# Altium PCB uw_ipmc_zynq.PcbDoc (part 1 of 3)
Units mil, origin at the board's own origin, x right, y up, seen from the top; angles counter-clockwise.
Board outline 3228.35 x 1181.1 mil, 10 copper layers (Component Side, Ground Plane 1 (GND), Inner Layer 1, Inner Layer 2, Power Plane 1, Power Plane 2, Inner Layer 3, Inner Layer 4, Power Plane 3, Solder Side), stack 39.78 mil thick; 400 components, 397 nets, 1698 pads, 375 vias.
Unrouted connection lines stored in the file: 685.
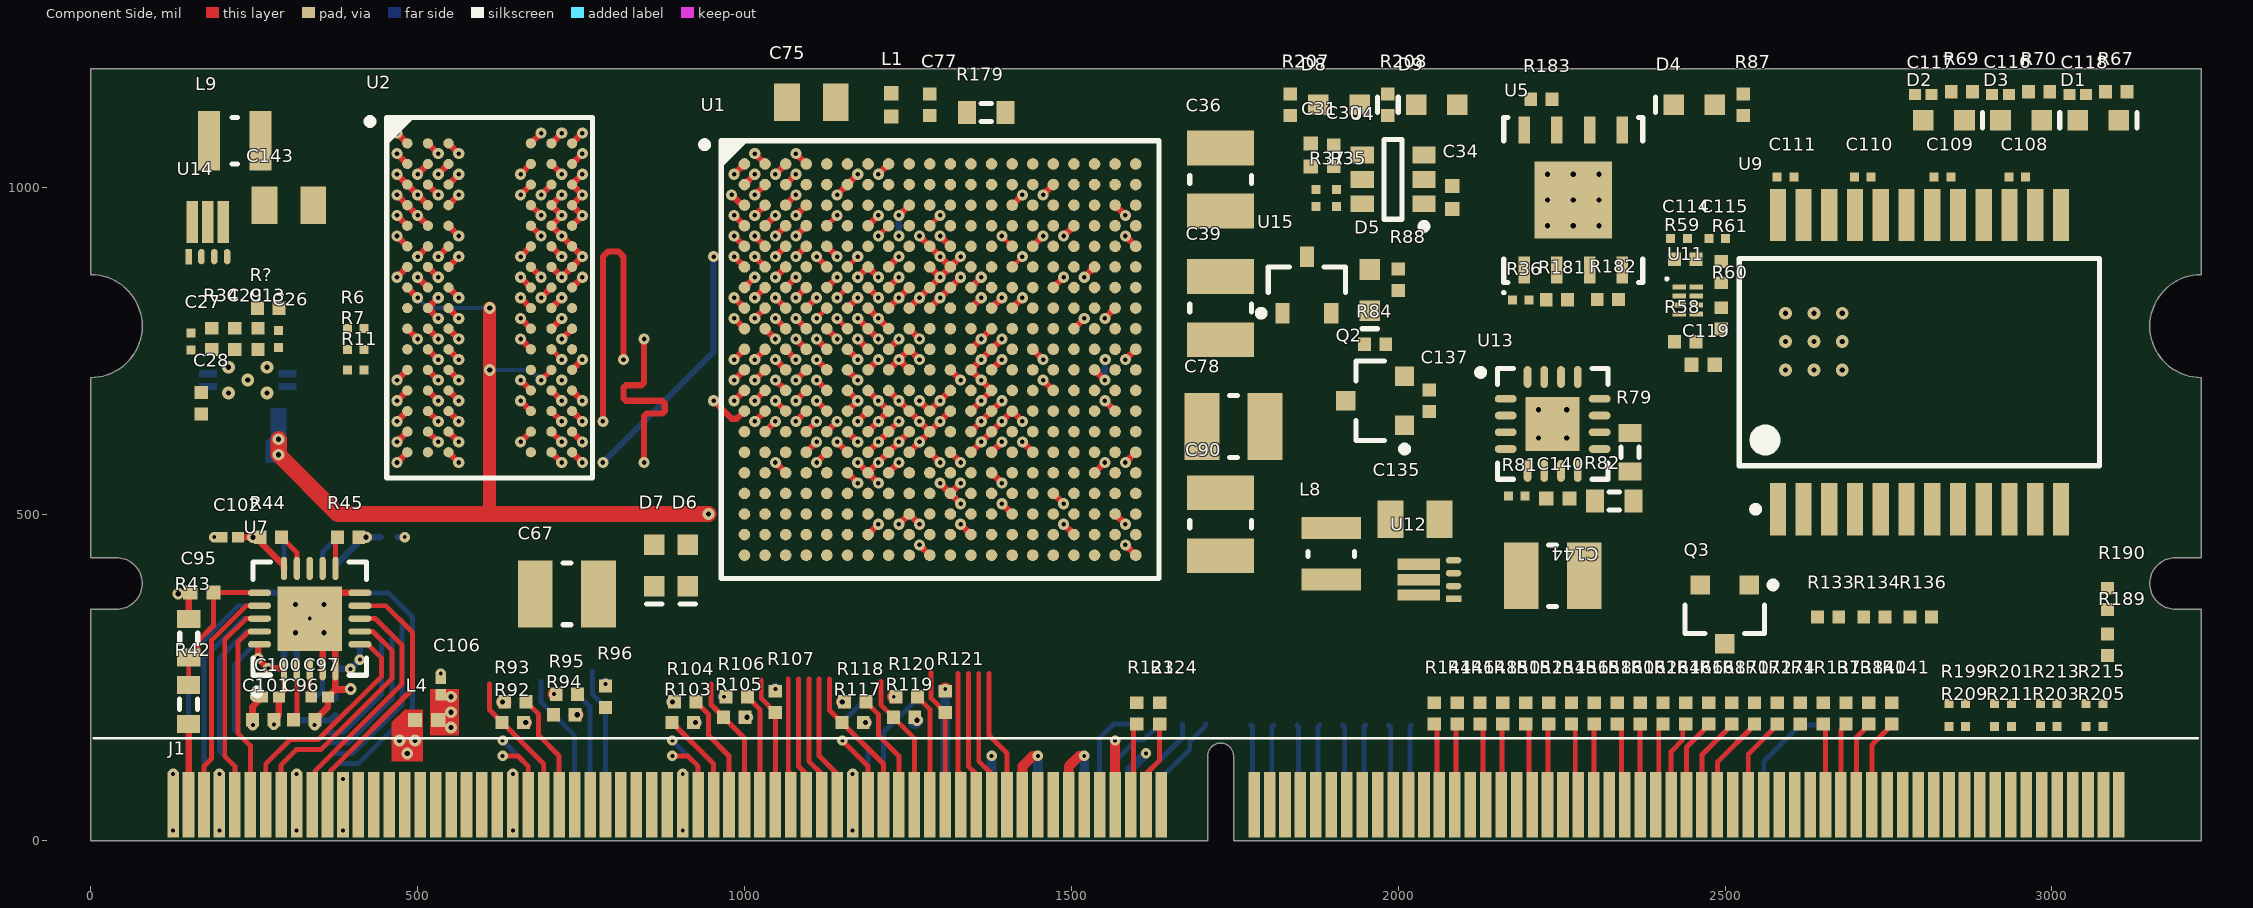
[diagram p0: Component Side view]
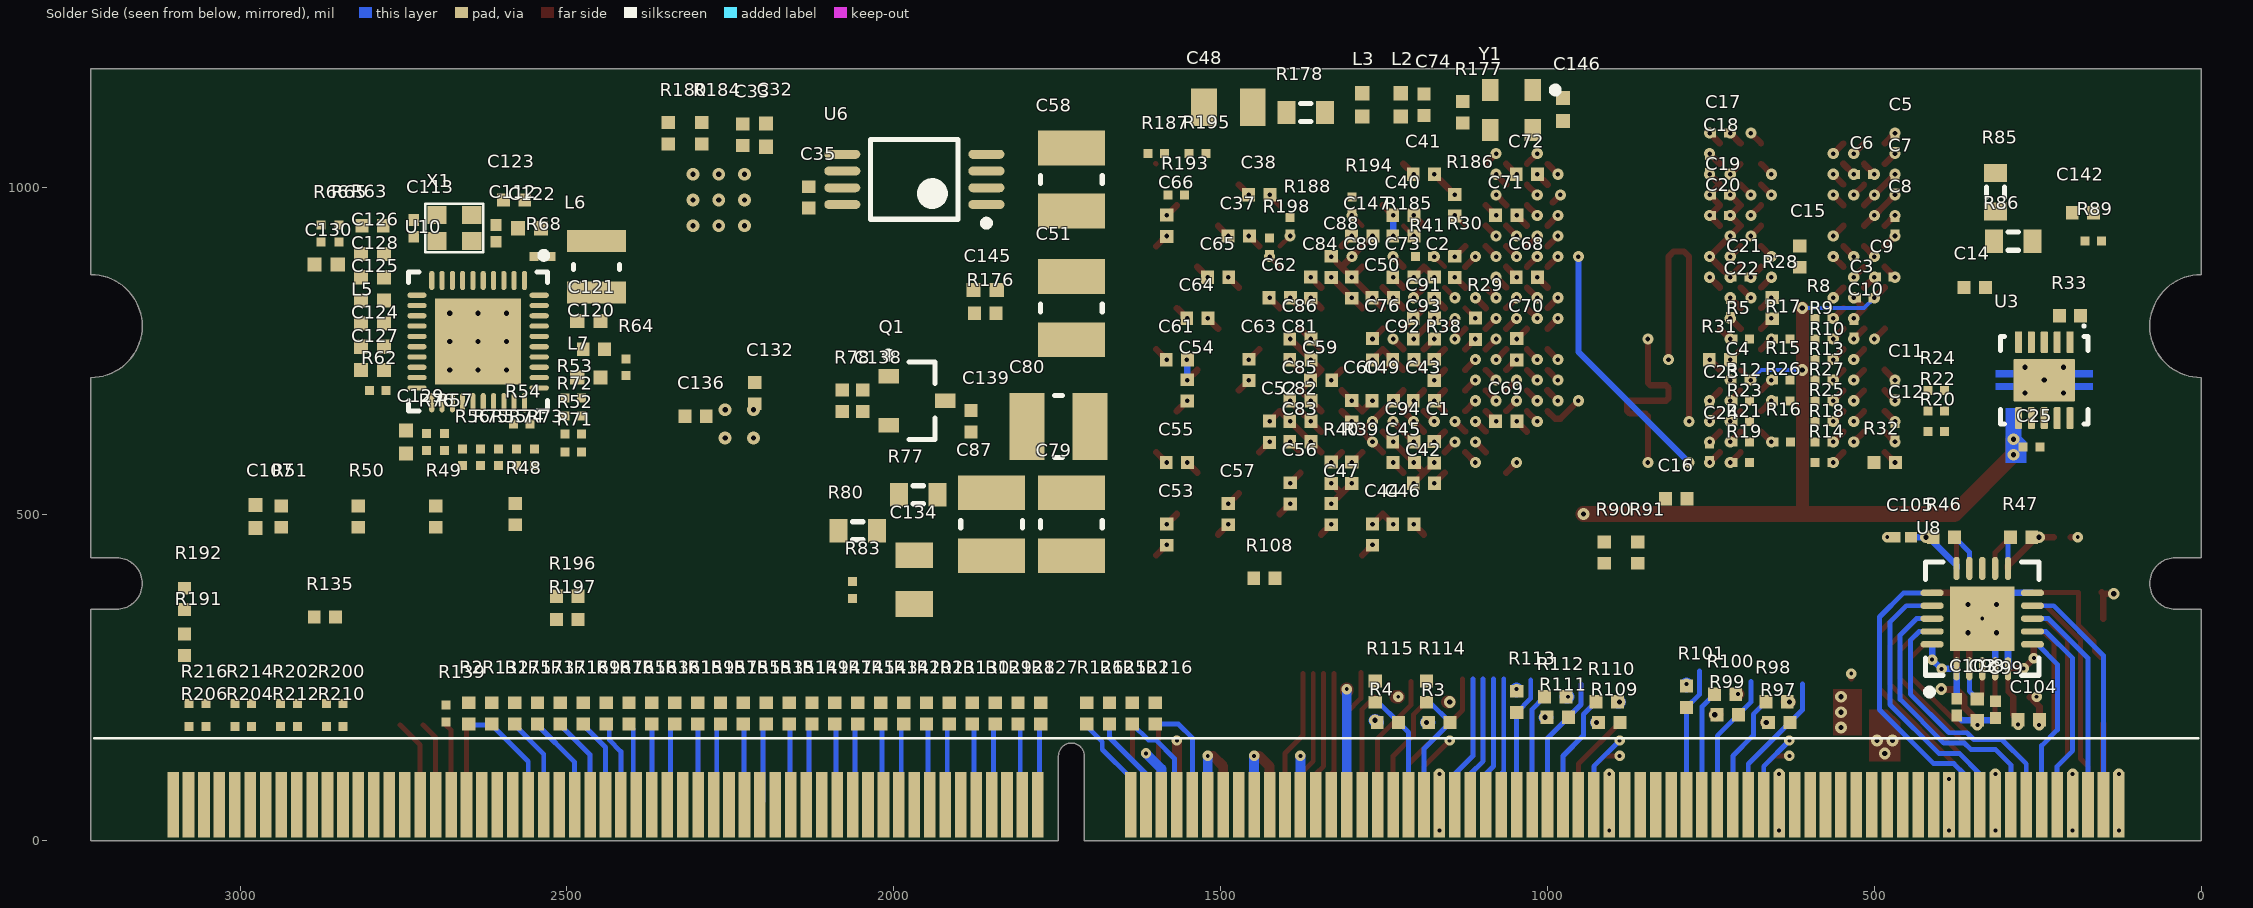
[diagram p1: Solder Side view, seen from below]
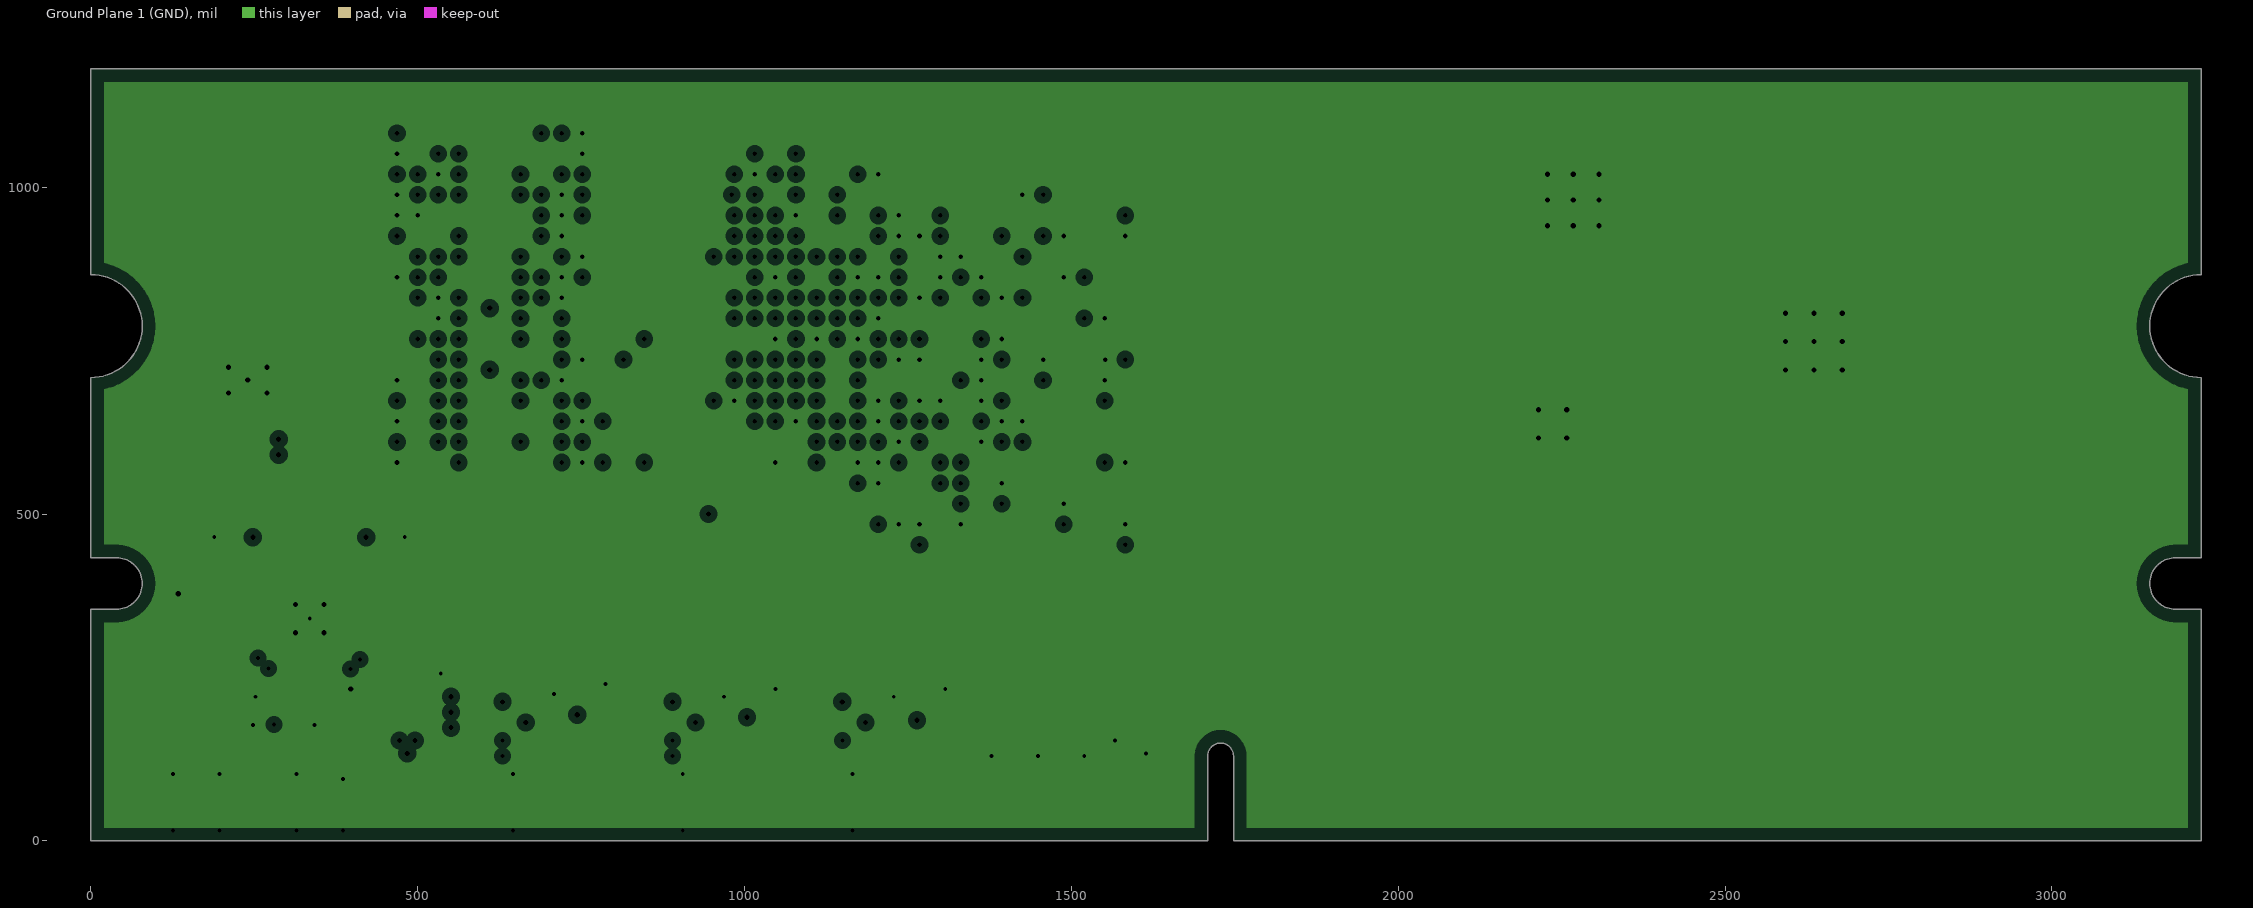
[diagram p2: Ground Plane 1 (GND), clearances drawn from the general rule]
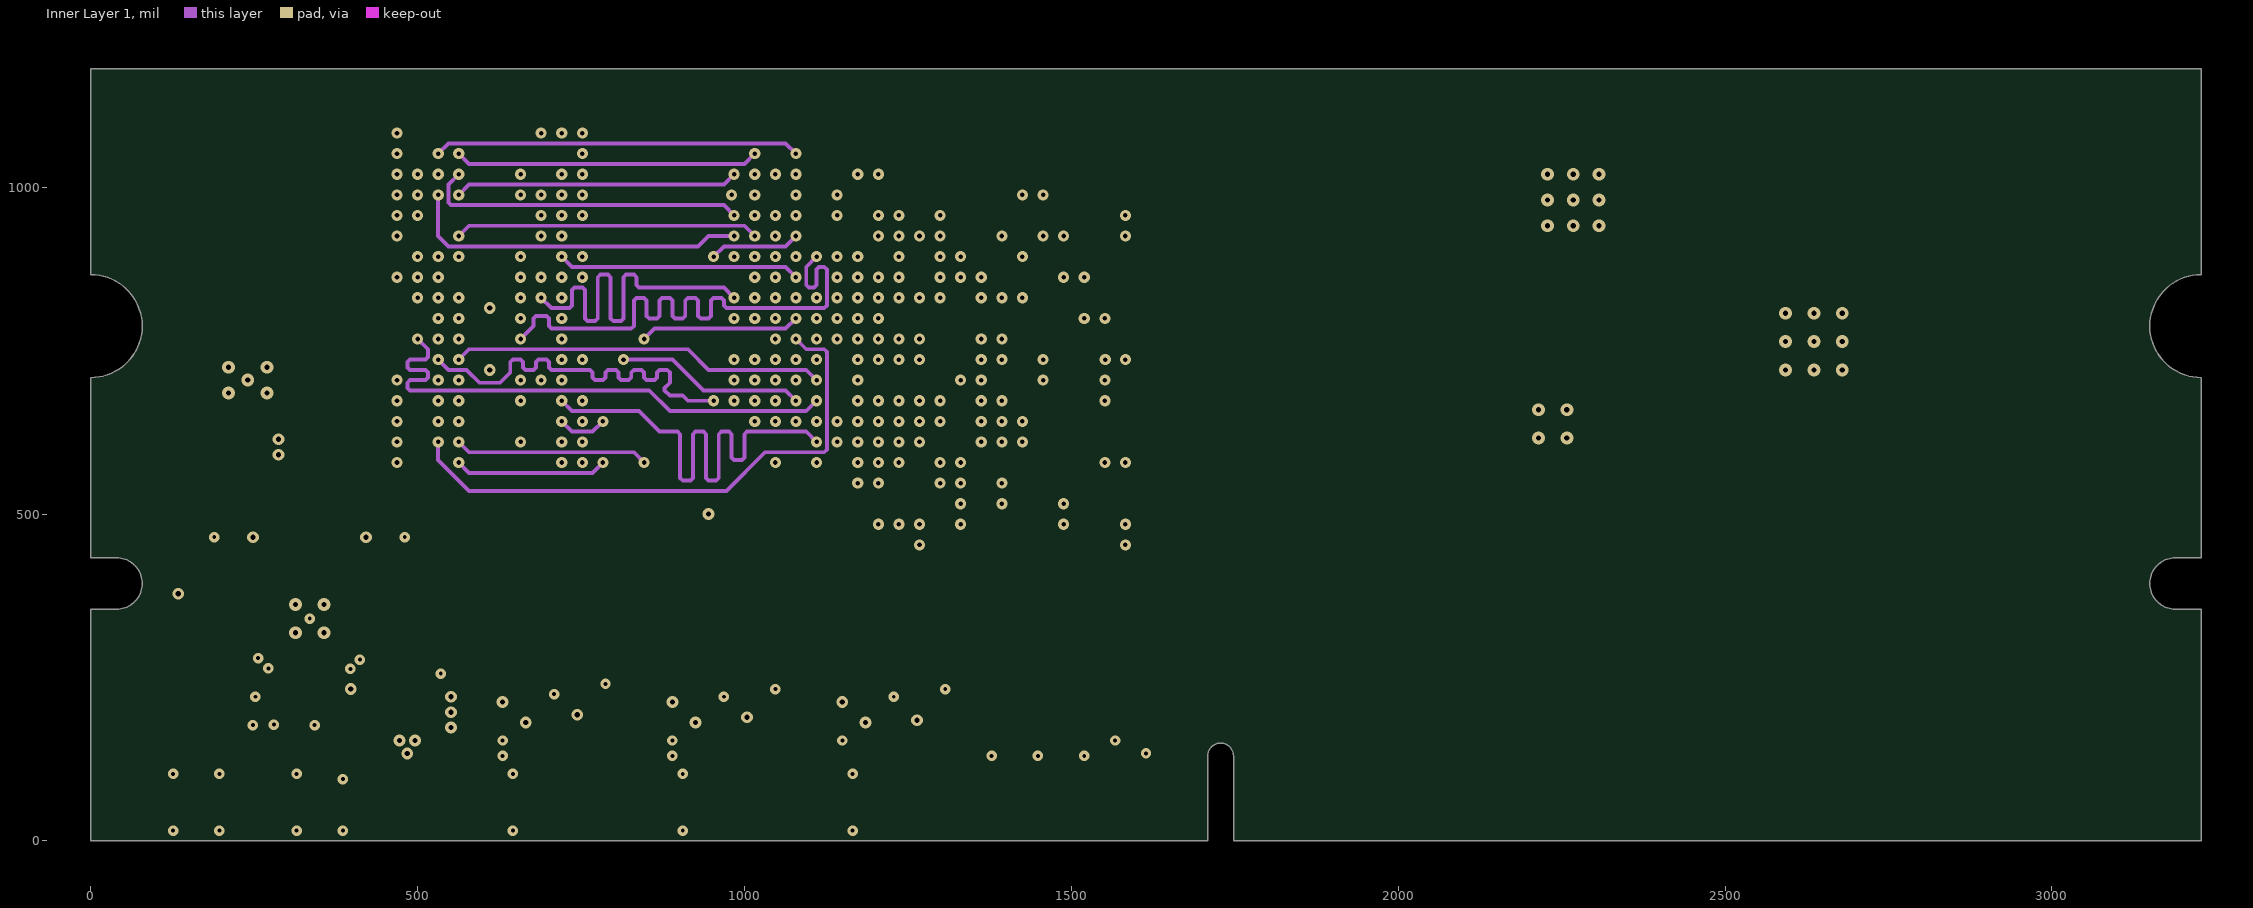
[diagram p3: Inner Layer 1]
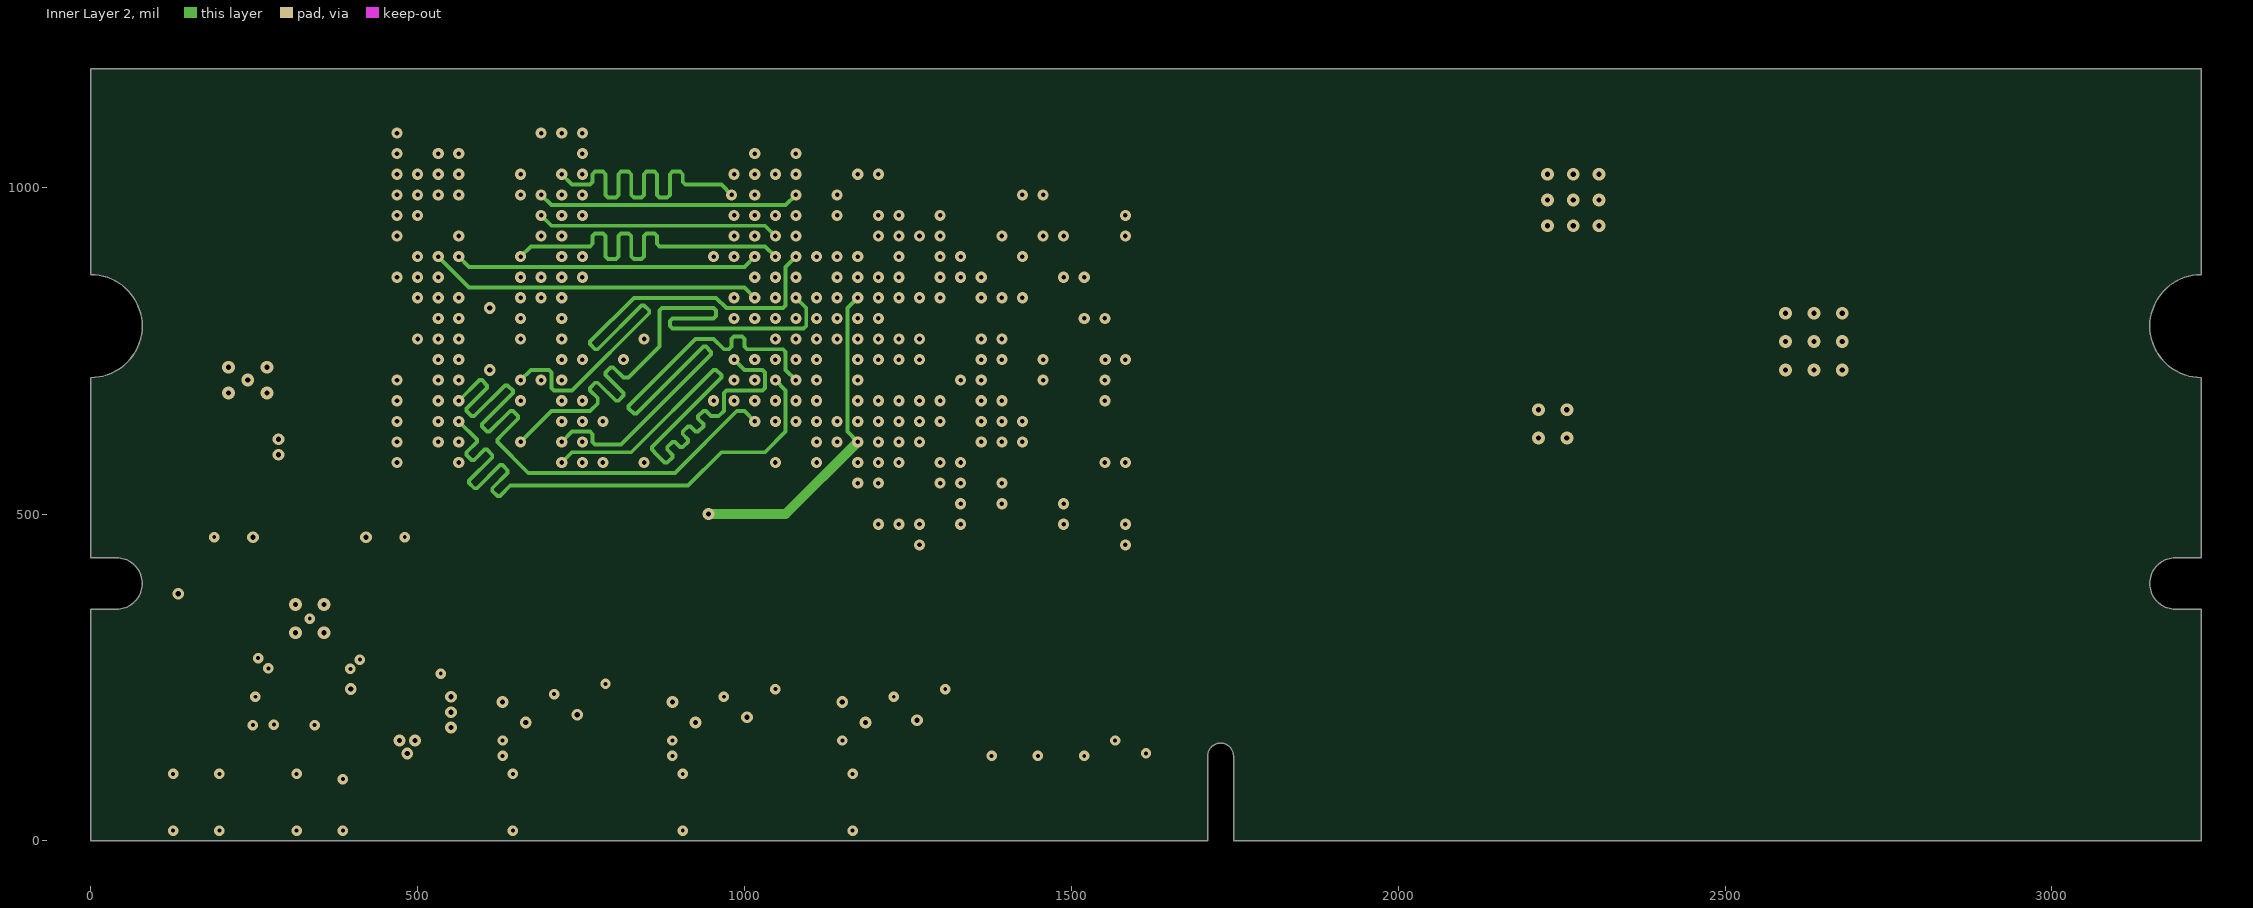
[diagram p4: Inner Layer 2]
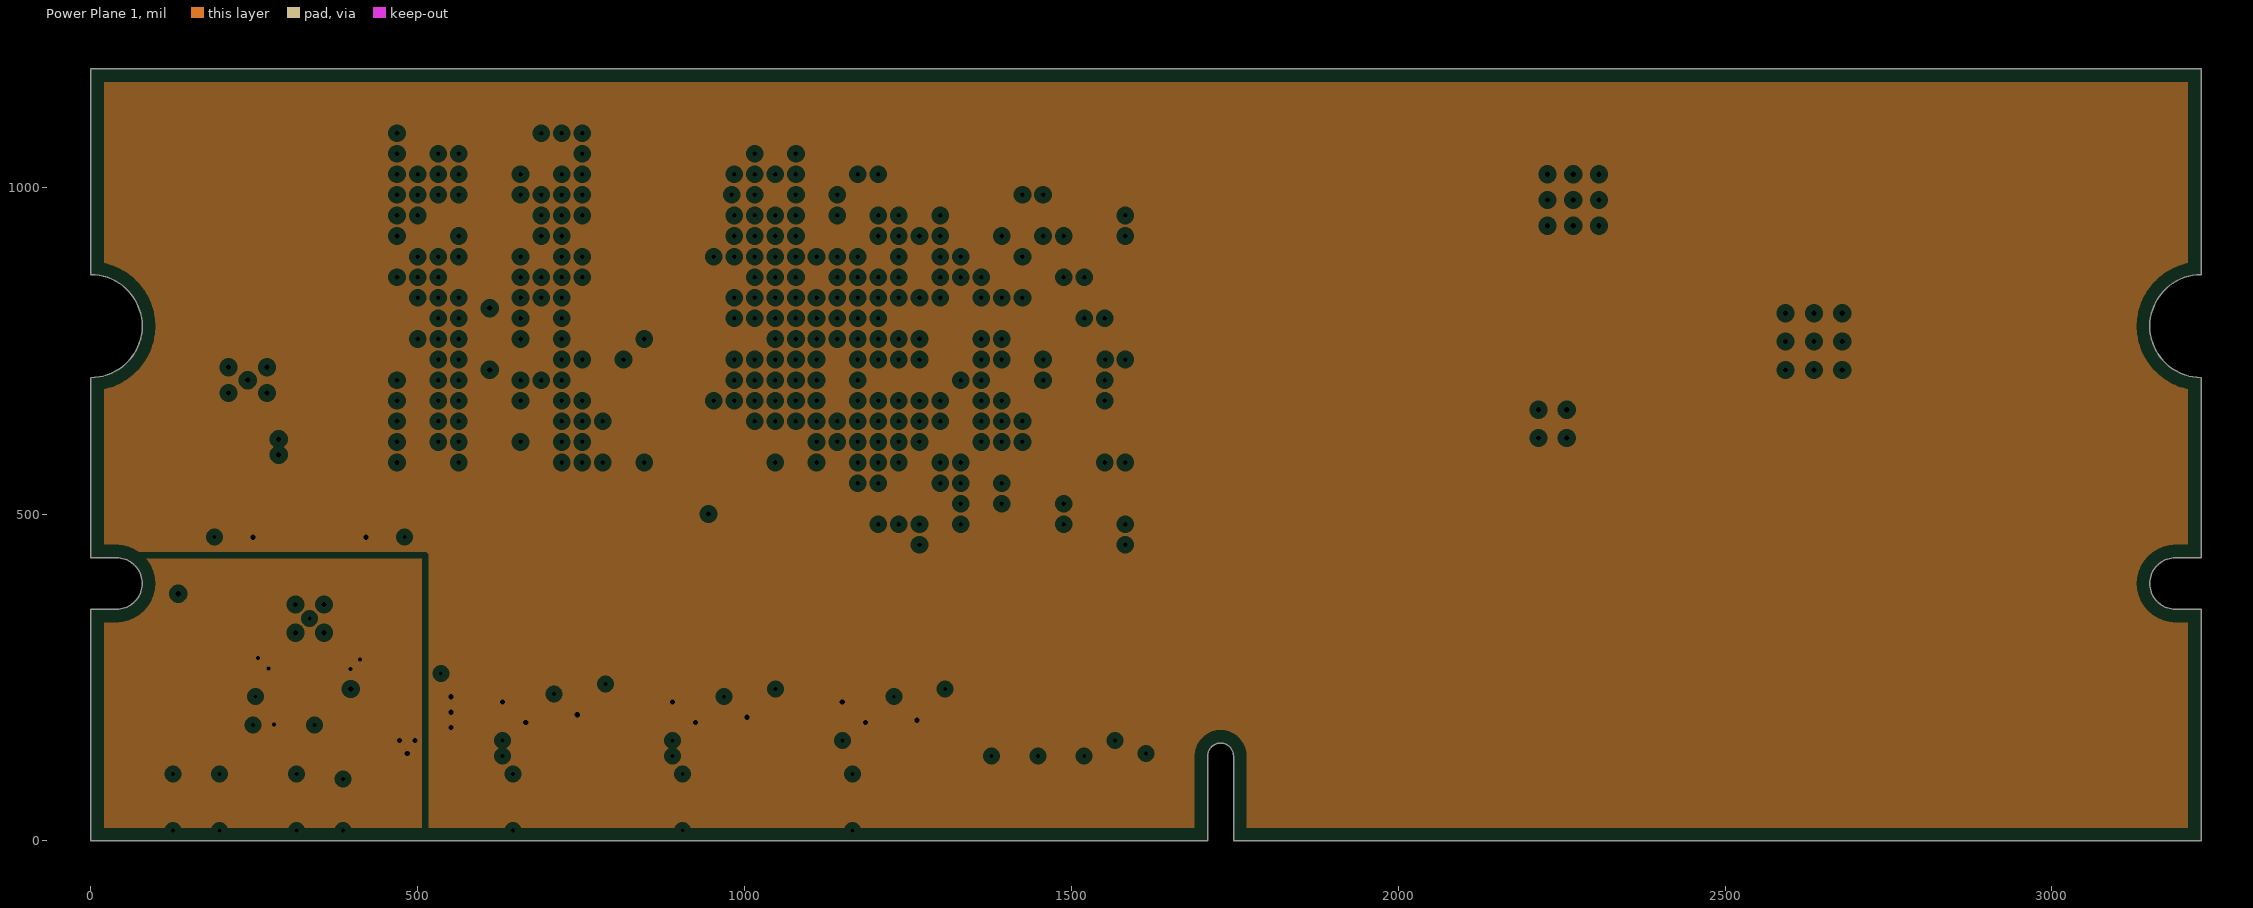
[diagram p5: Power Plane 1, clearances drawn from the general rule]
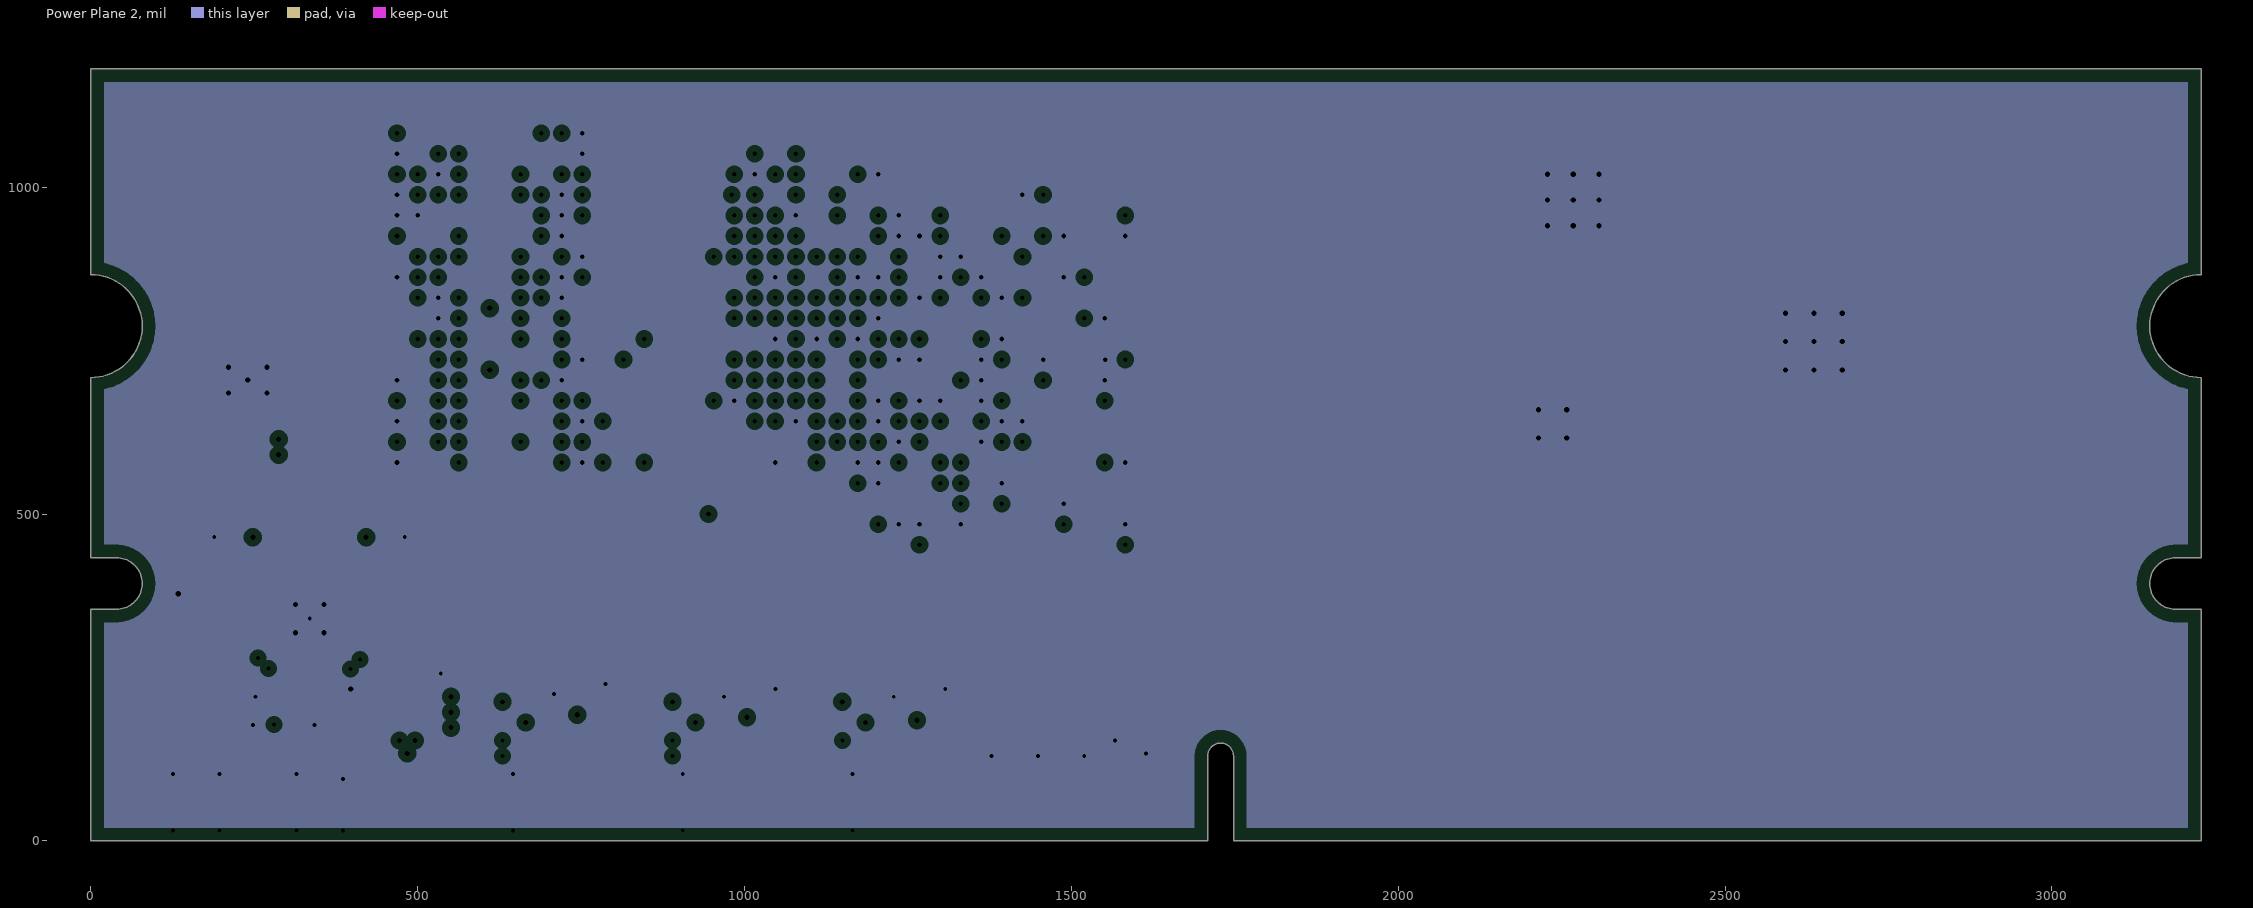
[diagram p6: Power Plane 2, clearances drawn from the general rule]
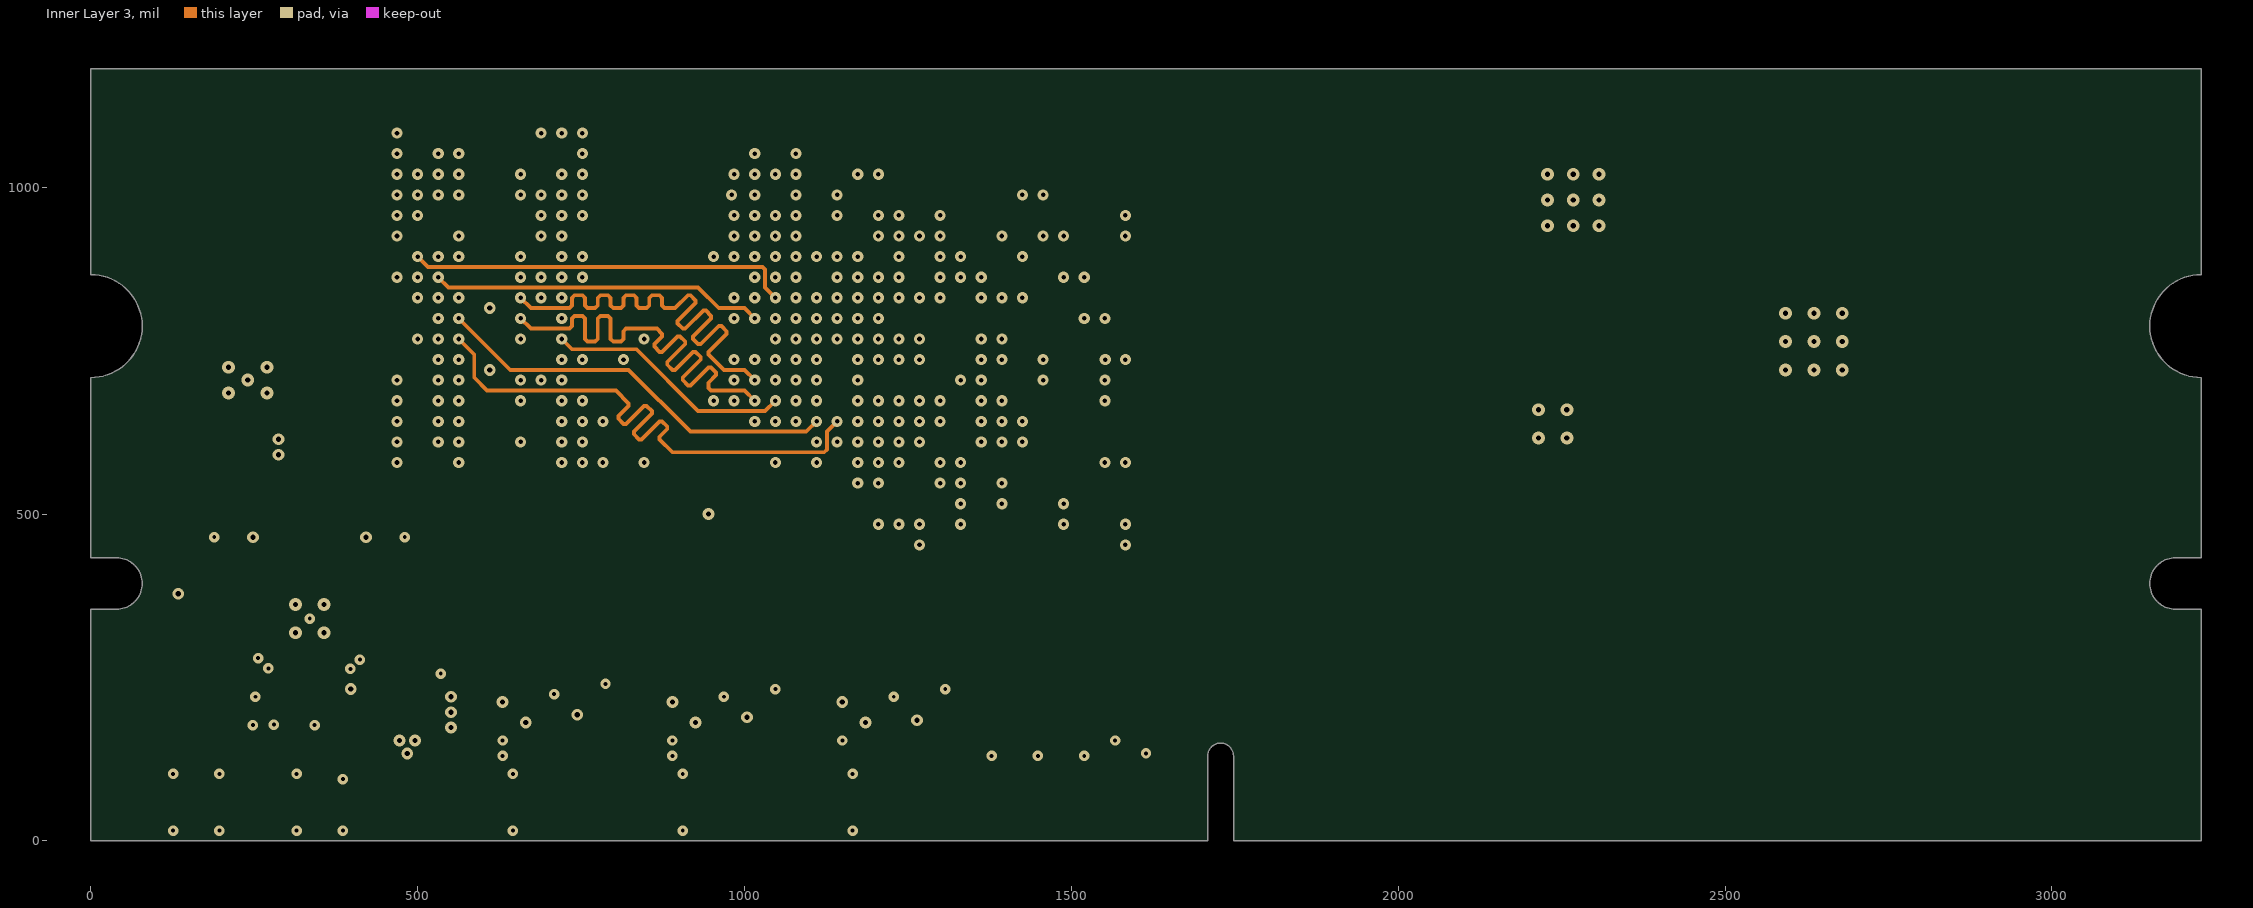
[diagram p7: Inner Layer 3]
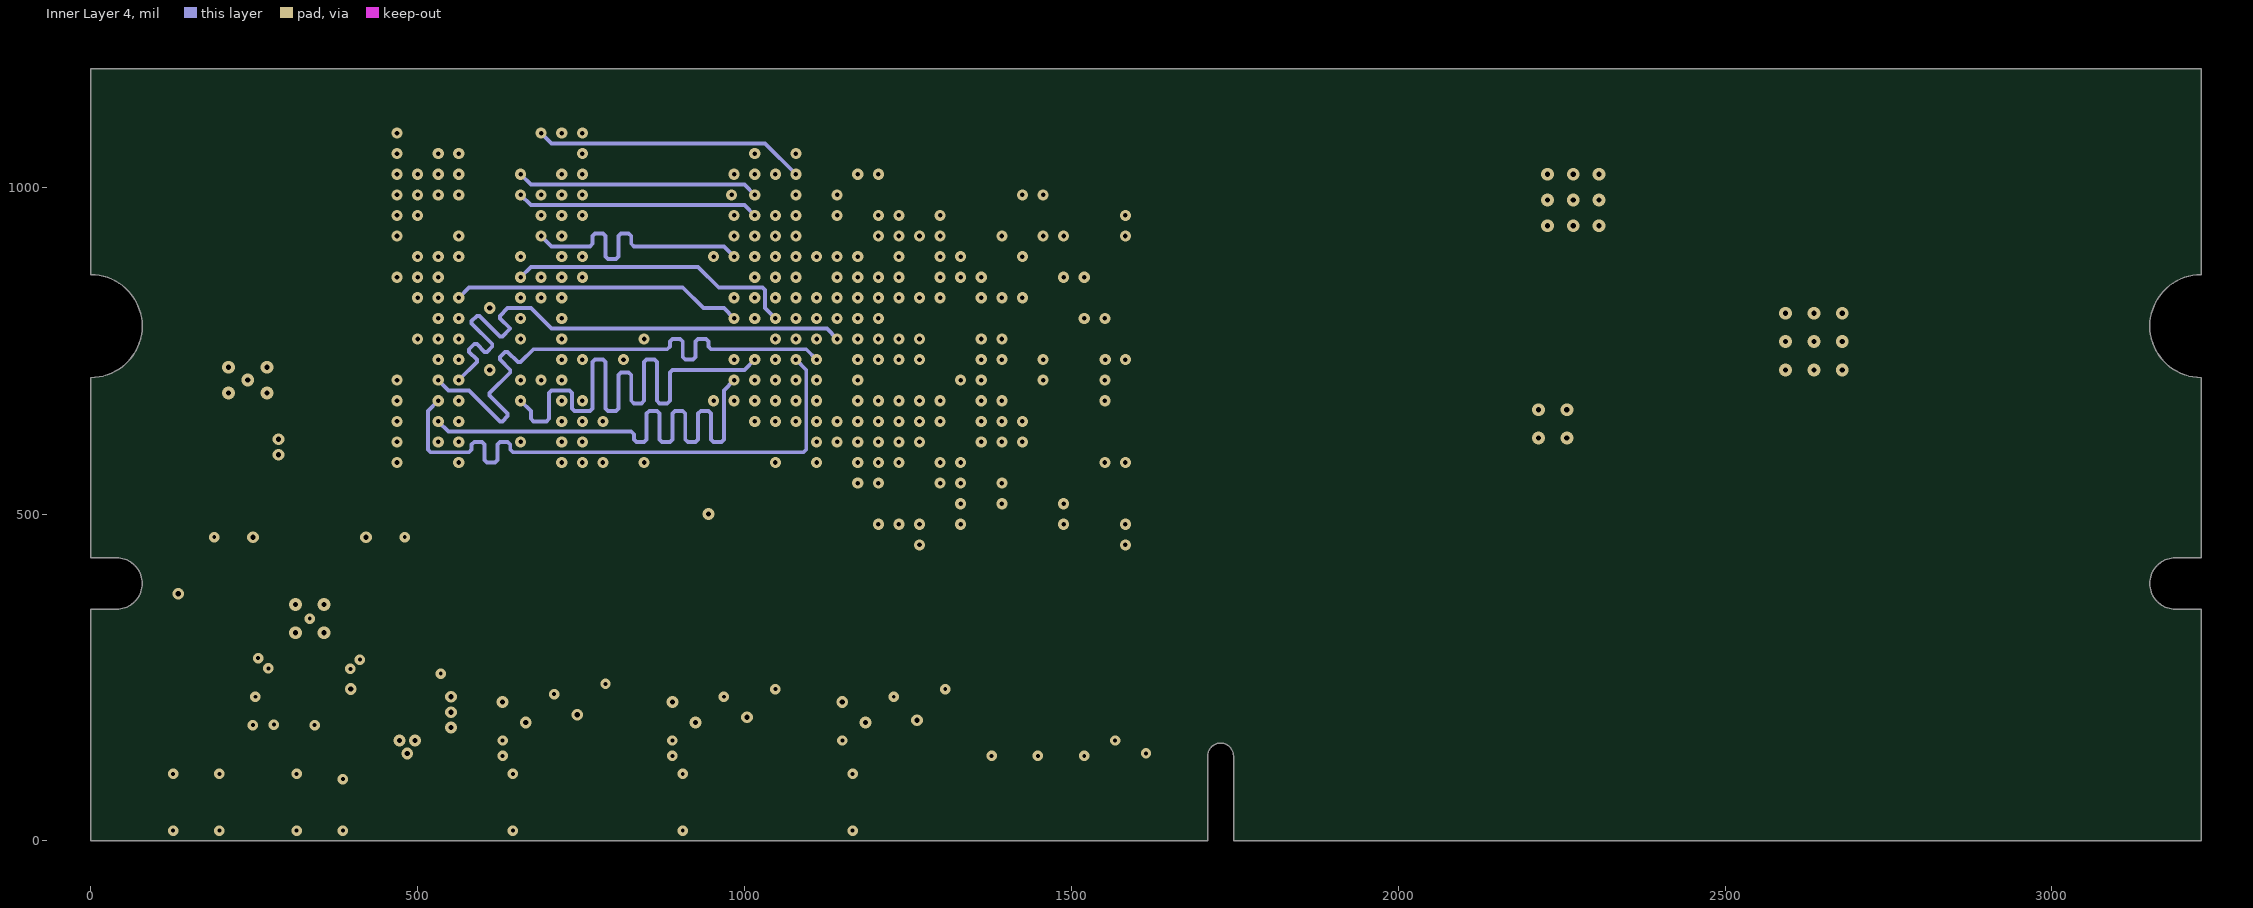
[diagram p8: Inner Layer 4]
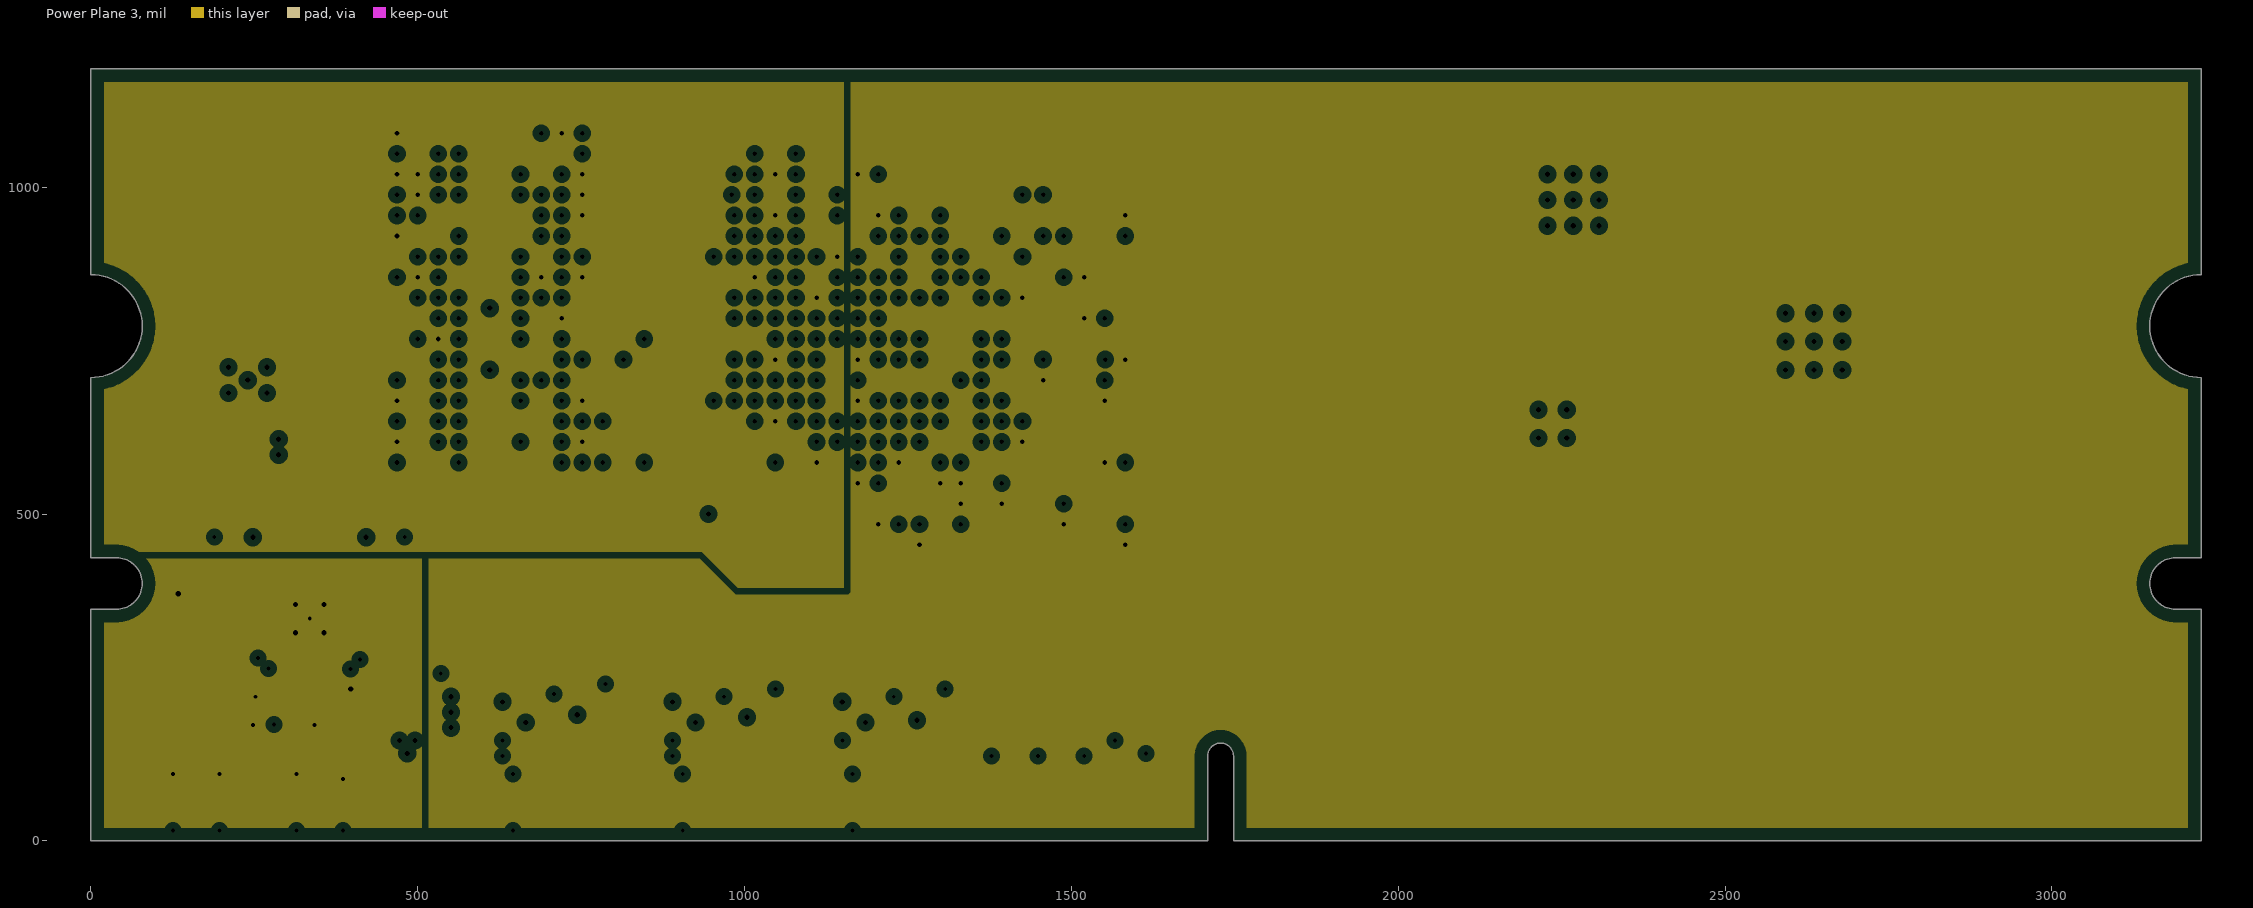
[diagram p9: Power Plane 3, clearances drawn from the general rule]

## Layer stack, top to bottom
Top Solder: solder mask 1, Solder Resist, Dk 4.15
Component Side: signal copper 2.83
Dielectric 1: prepreg 3.59, Dk 3.5
Ground Plane 1 (GND): plane copper 0.7, net GND
Dielectric 2: core 3, FR-4, Dk 3.5
Inner Layer 1: signal copper 0.7
Dielectric 3: prepreg 2.88, Dk 3.5
Inner Layer 2: signal copper 0.7
Dielectric 4: core 3, Dk 3.5
Power Plane 1: plane copper 0.7, net (Multiple Nets)
Dielectric 5: prepreg 3.58, Dk 3.5
Power Plane 2: plane copper 0.7, net GND
Dielectric 6: core 3, Dk 3.5
Inner Layer 3: signal copper 0.7
Dielectric 7: prepreg 2.88, Dk 3.5
Inner Layer 4: signal copper 0.7
Dielectric 8: core 3, Dk 3.5
Power Plane 3: plane copper 0.7, net (Multiple Nets)
Dielectric 9: prepreg 3.59, Dk 3.5
Solder Side: signal copper 2.83
Bottom Solder: solder mask 1, Solder Resist, Dk 4.15

## Board outline
0,0 1708.66,0 1708.66,129.92 cw(c1728.35,129.92) 1728.35,149.61 cw(c1728.35,129.92) 1748.03,129.92 1748.03,0 3228.35,0 3228.35,314.96 3228.35,354.33 3188.98,354.33 cw(c3188.98,393.7) 3149.61,393.7 cw(c3188.98,393.7) 3188.98,433.07 3228.35,433.07 3228.35,708.66 cw(c3228.35,787.4) 3149.61,787.4 cw(c3228.35,787.4) 3228.35,866.14 3228.35,1181.1 0,1181.1 0,866.14 cw(c0,787.4) 78.74,787.4 cw(c0,787.4) 0,708.66 0,433.07 39.37,433.07 cw(c39.37,393.7) 78.74,393.7 cw(c39.37,393.7) 39.37,354.33 0,354.33 0,0

## Design rules (kind name [scope] priority, off if disabled: settings)
Clearance Clearance_Special [InNet('VREF')] p1: gap=4 ignorepadtopadclearanceinfootprint=FALSE
Clearance Clearance_Power [(InNet('+12V_SENSE') OR InNet('VCC1.0') OR InNet('VCC1.5') OR InNet('VCC1.8') OR InNet('VCC2.5') OR InNet('VCC3.3') OR InNet('VCC3.3_IO') OR InNet('VDDH_REG') OR InNet('VREF') OR InNet('VTTRAM') OR InNet('GND'))] p2: gap=4 ignorepadtopadclearanceinfootprint=FALSE
Clearance Clearance_100ohm_inside [InNet('TRX_*') AND OnMid] p3: gap=4 ignorepadtopadclearanceinfootprint=FALSE
Clearance Clearance_100ohm_outside [InNet('TRX_*') AND OnOutside] p4: gap=4 ignorepadtopadclearanceinfootprint=FALSE except(5: Arc-Arc Arc-Track Arc-SMDPad Arc-THPad Arc-Via Arc-Fill Arc-Poly Arc-Region Arc-Text Arc-Hole Track-Track Track-SMDPad Track-THPad Track-Via Track-Fill Track-Poly Track-Region Track-Text Track-Hole)
Clearance Clearance_40ohm_inside [InNet('DD3_*') AND OnMid] p5: gap=4 ignorepadtopadclearanceinfootprint=FALSE except(6: Arc-Arc Arc-Track Arc-SMDPad Arc-THPad Arc-Via Arc-Fill Arc-Poly Arc-Region Arc-Text Arc-Hole Track-Track Track-SMDPad Track-THPad Track-Via Track-Fill Track-Poly Track-Region Track-Text Track-Hole)
Clearance Clearance_40ohm_outside [InNet('DDR3_*') AND OnOutside] p6: gap=4 ignorepadtopadclearanceinfootprint=FALSE except(8: Arc-Arc Arc-Track Arc-SMDPad Arc-THPad Arc-Via Arc-Fill Arc-Poly Arc-Region Arc-Text Arc-Hole Track-Track Track-SMDPad Track-THPad Track-Via Track-Fill Track-Poly Track-Region Track-Text Track-Hole)
Clearance Clearance_50ohm_inside [OnMid] p7: gap=4 ignorepadtopadclearanceinfootprint=FALSE
Clearance Clearance_50ohm_outside [OnOutside] p8: gap=4 ignorepadtopadclearanceinfootprint=FALSE except(6: Arc-Arc Arc-Track Arc-SMDPad Arc-THPad Arc-Via Arc-Fill Arc-Poly Arc-Region Arc-Text Arc-Hole Track-Track Track-SMDPad Track-THPad Track-Via Track-Fill Track-Poly Track-Region Track-Text Track-Hole)
ComponentClearance [All] p1: gap=9 collisioncheckmode=3 verticalgap=9 showdistances=FALSE
DiffPairsRouting DiffPairsRouting_80ohm [InNet('DDR3_*')] p1: maxlimit=50 minlimit=6 mostfreqgap=6 toplayer_mingap=9.5 toplayer_prefgap=9.5 toplayer_minwidth=9.5 toplayer_maxwidth=9.5 toplayer_prefwidth=9.5 midlayer1_minwidth=6 midlayer1_maxwidth=6 midlayer1_prefwidth=6 midlayer2_minwidth=6 midlayer2_maxwidth=6 midlayer2_prefwidth=6 midlayer3_minwidth=6 midlayer3_maxwidth=6 midlayer3_prefwidth=6 midlayer4_minwidth=6 midlayer4_maxwidth=6 midlayer4_prefwidth=6 bottomlayer_mingap=9.5 bottomlayer_prefgap=9.5 bottomlayer_minwidth=9.5 bottomlayer_maxwidth=9.5 bottomlayer_prefwidth=9.5 maxuncoupledlength=500
DiffPairsRouting DiffPairsRouting_100ohm [InNet('TRX_*')] p2: maxlimit=6.05 minlimit=5.45 mostfreqgap=6 toplayer_minwidth=5 toplayer_maxwidth=5 toplayer_prefwidth=5 midlayer1_mingap=6 midlayer1_maxgap=6 midlayer1_minwidth=4.4 midlayer1_maxwidth=4.4 midlayer1_prefwidth=4.4 midlayer2_mingap=6 midlayer2_maxgap=6 midlayer2_minwidth=4.4 midlayer2_maxwidth=4.4 midlayer2_prefwidth=4.4 midlayer3_mingap=6 midlayer3_maxgap=6 midlayer3_minwidth=4.4 midlayer3_maxwidth=4.4 midlayer3_prefwidth=4.4 midlayer4_mingap=6 midlayer4_maxgap=6 midlayer4_minwidth=4.4 midlayer4_maxwidth=4.4 midlayer4_prefwidth=4.4 bottomlayer_minwidth=5 bottomlayer_maxwidth=5 bottomlayer_prefwidth=5 maxuncoupledlength=500
DiffPairsRouting [All] p3: maxlimit=15 minlimit=5 mostfreqgap=10 toplayer_minwidth=6 toplayer_maxwidth=10 toplayer_prefwidth=8 midlayer1_minwidth=6 midlayer1_maxwidth=10 midlayer1_prefwidth=8 midlayer2_minwidth=6 midlayer2_maxwidth=10 midlayer2_prefwidth=8 midlayer3_minwidth=6 midlayer3_maxwidth=10 midlayer3_prefwidth=8 midlayer4_minwidth=6 midlayer4_maxwidth=10 midlayer4_prefwidth=8 bottomlayer_minwidth=6 bottomlayer_maxwidth=10 bottomlayer_prefwidth=8 maxuncoupledlength=500
FabricationTestPointUsage TestPointUsage [All] p1: valid=0 allowmultiple=FALSE
FabricationTestpoint Testpoint [All] p1: side=3 testpointundercomponent=TRUE minsize=40 maxsize=100 preferedsize=60 minholesize=0 maxholesize=40 preferedholesize=32 testpointgrid=1 allowsidetop=TRUE allowsidebottom=TRUE usegrid=TRUE gridtolerance=0.01
PlaneClearance [All] p1: clearance=10
PlaneConnect [All] p1: planeconnectstyle=Relief reliefexpansion=15 reliefentries=4 reliefconductorwidth=30 reliefairgap=10
PolygonConnect [All] p1: connectstyle=Relief reliefconductorwidth=10 reliefentries=4 polygonreliefangle="90 Angle" airgapwidth=10
RoutingVias RoutingVias_Power [(InNet('+12V_SENSE') OR InNet('VCC1.0') OR InNet('VCC1.5') OR InNet('VCC1.8') OR InNet('VCC2.5') OR InNet('VCC3.3') OR InNet('VCC3.3_IO') OR InNet('VDDH_REG') OR InNet('VREF') OR InNet('VTTRAM') OR InNet('GND'))] p1: holewidth=8 width=18 viastyle="Through Hole" minholewidth=7 minwidth=17 maxholewidth=18 maxwidth=28
RoutingVias [All] p2: holewidth=6 width=16 viastyle="Through Hole" minholewidth=6 minwidth=16 maxholewidth=16 maxwidth=26
SilkToSolderMaskClearance SilkscreenOverComponentPads [IsPad] p1: minsilkscreentomaskgap=10 clearancetoexposedcopper=TRUE
SolderMaskExpansion [All] p1: expansion=2
Width Width_Special [InNet('VREF')] p1: maxlimit=30 minlimit=6 preferedwidth=15
Width Width_Power [(InNet('+12V_SENSE') OR InNet('VCC1.0') OR InNet('VCC1.5') OR InNet('VCC1.8') OR InNet('VCC2.5') OR InNet('VCC3.3') OR InNet('VCC3.3_IO') OR InNet('VDDH_REG') OR InNet('VREF') OR InNet('VTTRAM') OR InNet('GND'))] p2: maxlimit=20 minlimit=10 preferedwidth=20 minimp=50.000000 maximp=50.000000 favimp=50.000000
Width Width_100ohm [InNet('TRX_*')] p3: maxlimit=5 minlimit=4.4 preferedwidth=4.4 toplayer_minwidth=5 toplayer_prefwidth=5 midlayer1_maxwidth=4.4 midlayer2_maxwidth=4.4 midlayer3_maxwidth=4.4 midlayer4_maxwidth=4.4 bottomlayer_minwidth=5 bottomlayer_prefwidth=5 minimp=50.000000 maximp=50.000000 favimp=50.000000
Width Width_40ohm [InNet('DDR3_*')] p4: maxlimit=9.5 minlimit=6 preferedwidth=6 toplayer_minwidth=9.5 toplayer_prefwidth=9.5 midlayer1_maxwidth=6 midlayer2_maxwidth=6 midlayer3_maxwidth=6 midlayer4_maxwidth=6 bottomlayer_minwidth=9.5 bottomlayer_prefwidth=9.5 minimp=50.000000 maximp=50.000000 favimp=50.000000
Width Width_50ohm [All] p5: maxlimit=7.5 minlimit=4.5 preferedwidth=4.5 toplayer_minwidth=7.5 toplayer_prefwidth=7.5 midlayer1_maxwidth=4.5 midlayer2_maxwidth=4.5 midlayer3_maxwidth=4.5 midlayer4_maxwidth=4.5 bottomlayer_minwidth=7.5 bottomlayer_prefwidth=7.5 minimp=50.000000 maximp=50.000000 favimp=50.000000
23 further rules are at their usual default settings.

## Classes and differential pairs
net class NETS_40OHM: DDR3_A0 DDR3_A1 DDR3_A2 DDR3_A3 DDR3_A4 DDR3_A5 DDR3_A6 DDR3_A7 DDR3_A8 DDR3_A9 DDR3_A10 DDR3_A11 DDR3_A12 DDR3_A13 DDR3_BA0 DDR3_BA1 DDR3_BA2 DDR3_CAS# DDR3_CKE DDR3_CS# DDR3_DM0 DDR3_DM1 DDR3_DQ0 DDR3_DQ1 DDR3_DQ2 DDR3_DQ3 DDR3_DQ4 DDR3_DQ5 DDR3_DQ6 DDR3_DQ7 DDR3_DQ8 DDR3_DQ9 DDR3_DQ10 DDR3_DQ11 DDR3_DQ12 DDR3_DQ13 DDR3_DQ14 DDR3_DQ15 DDR3_ODT DDR3_RAS# DDR3_RESET# DDR3_WE#
net class NETS_POWER: +12V_SENSE AVCC3.3 AVDD33 AVDDL DVDDL GND RGMII_VREF_1.25V VCC1.0 VCC1.5 VCC1.8 VCC3.3 VCC3.3_IO VCCADC VCCPLL VDDH_REG VDDIO_REG VREF VRN VRP
net class ZYNQ_MISC: \QSPI_S \SPI_CS0 \SPI_CS1 JTAG_MASTER_TCK JTAG_MASTER_TDI JTAG_MASTER_TDO JTAG_MASTER_TMS JTAG_MASTER_TRST NetR133_2 NetR134_2 NetR135_2 NetR136_2 PL_LED_RED PL_LED_YELLOW PS_LED_RED PS_LED_YELLOW QSPI_CLK QSPI_DQ0 QSPI_DQ1 QSPI_DQ2 QSPI_DQ3 SPI_CLK SPI_MISO SPI_MOSI
net class IPMI: ALARM_A ALARM_B HA0 HA1 HA2 HA3 HA4 HA5 HA6 HA7 HNDL_SW IPMB-A_SCL IPMB-A_SDA IPMB-B_SCL IPMB-B_SDA PG_A PG_B PYLD12V_EN
net class MMC_CTRL: \ENABLE_0 \ENABLE_1 \ENABLE_2 \ENABLE_3 \ENABLE_4 \PS1_0 \PS1_1 \PS1_2 \PS1_3 \PS1_4 IPMB-L_SCL_0 IPMB-L_SCL_1 IPMB-L_SCL_2 IPMB-L_SCL_3 IPMB-L_SCL_4 IPMB-L_SDA_0 IPMB-L_SDA_1 IPMB-L_SDA_2 IPMB-L_SDA_3 IPMB-L_SDA_4 MP_ENA_0 MP_ENA_1 MP_ENA_2 MP_ENA_3 MP_ENA_4 MP_FLT_0 MP_FLT_1 MP_FLT_2 MP_FLT_3 MP_FLT_4 MP_PG_0 MP_PG_1 MP_PG_2 MP_PG_3 MP_PG_4 PWR_ENA_0 PWR_ENA_1 PWR_ENA_2 PWR_ENA_3 PWR_ENA_4 PWR_FLT_0 PWR_FLT_1 PWR_FLT_2 PWR_FLT_3 PWR_FLT_4 PWR_PG_0 PWR_PG_1 PWR_PG_2 PWR_PG_3 PWR_PG_4
net class PHY: GB_A_N GB_A_P GB_B_N GB_B_P GB_C_N GB_C_P GB_D_N GB_D_P LED_10_100 LED_1000 LED_ACT MDC MDIO MDIO_CLK MDIO_DIO PHY_RESET RGMII_RX_CLK RGMII_RX_CTL RGMII_RX_D0 RGMII_RX_D1 RGMII_RX_D2 RGMII_RX_D3 RGMII_TX_CLK RGMII_TX_CTL RGMII_TX_D0 RGMII_TX_D1 RGMII_TX_D2 RGMII_TX_D3 RX_CLK RX_DV RXD0 RXD1 RXD2 RXD3 TRX0_N TRX0_P TRX1_N TRX1_P TRX2_N TRX2_P TRX3_N TRX3_P
net class ADC: +12V_SENSE \ADC-A_SPI_CS \ADC-B_SPI_CS ADC-A_IN0 ADC-A_IN1 ADC-A_IN2 ADC-A_IN3 ADC-A_IN4 ADC-A_IN5 ADC-A_IN6 ADC-A_IN7 ADC-A_SPI_CLK ADC-A_SPI_MISO ADC-A_SPI_MOSI ADC-B_IN0 ADC-B_IN1 ADC-B_IN2 ADC-B_IN3 ADC-B_IN4 ADC-B_IN5 ADC-B_IN6 ADC-B_IN7 ADC-B_SPI_CLK ADC-B_SPI_MISO ADC-B_SPI_MOSI
net class GPIO: GPIO_14 GPIO_15 GPIO_16 GPIO_17 GPIO_18 GPIO_19 GPIO_20 GPIO_21 GPIO_22 GPIO_23 GPIO_24 GPIO_25 GPIO_26 GPIO_27 GPIO_28 GPIO_29 GPIO_30 GPIO_31 GPIO_32 GPIO_33 GPIO_34 GPIO_35 GPIO_36 GPIO_37 GPIO_38 GPIO_39 GPIO_40 GPIO_41 GPIO_42 GPIO_43 GPIO_44 GPIO_45 GPIO_46 GPIO_47 GPIO_48 PL_GPIO_14 PL_GPIO_15 PL_GPIO_16 PL_GPIO_17 PL_GPIO_18 PL_GPIO_19 PL_GPIO_20 PL_GPIO_21 PL_GPIO_22 PL_GPIO_23 PL_GPIO_24 PL_GPIO_25 PL_GPIO_26 PL_GPIO_27 PL_GPIO_28 PL_GPIO_29 PL_GPIO_30 PL_GPIO_31 PL_GPIO_32 PL_GPIO_33 PL_GPIO_34 PL_GPIO_35 PL_GPIO_36 PL_GPIO_37 PL_GPIO_38 PL_GPIO_39 PL_GPIO_40 PL_GPIO_41 PL_GPIO_42 PL_GPIO_43 PL_GPIO_44 PL_GPIO_45 PL_GPIO_46 PL_GPIO_47
net class DDR_ADDR_CTRL: DDR3_A0 DDR3_A1 DDR3_A2 DDR3_A3 DDR3_A4 DDR3_A5 DDR3_A6 DDR3_A7 DDR3_A8 DDR3_A9 DDR3_A10 DDR3_A11 DDR3_A12 DDR3_A13 DDR3_BA0 DDR3_BA1 DDR3_BA2 DDR3_CAS# DDR3_CKE DDR3_CS# DDR3_ODT DDR3_RAS# DDR3_RESET# DDR3_WE#
net class DDR_BANK0: DDR3_DM0 DDR3_DQ0 DDR3_DQ1 DDR3_DQ2 DDR3_DQ3 DDR3_DQ4 DDR3_DQ5 DDR3_DQ6 DDR3_DQ7 DDR3_DQS0_N DDR3_DQS0_P
net class DDR_BANK1: DDR3_DM1 DDR3_DQ8 DDR3_DQ9 DDR3_DQ10 DDR3_DQ11 DDR3_DQ12 DDR3_DQ13 DDR3_DQ14 DDR3_DQ15 DDR3_DQS1_N DDR3_DQS1_P
net class DDR_CLOCK: DDR3_CK_N DDR3_CK_P
component class ZynqPower: C36 C37 C38 C39 C40 C41 C42 C43 C44 C45 C46 C47 C48 C49 C50 C51 C52 C53 C54 C55 C56 C57 C58 C59 C60 C61 C62 C63 C64 C65 C66 C67 C68 C69 C70 C71 C72 C73 C74 C75 C76 C77 C78 C79 C80 C81 C82 C83 C84 C85 C86 C87 C88 C89 C90 C91 C92 C93 C94 L1 L2 L3 R38 R39 R40 R41
component class ZynqPeripherals: C30 C31 C32 C33 C34 C35 R35 R36 R37 U4 U5 U6
component class ZynqMIO: C145 C146 C147 C150 D8 D9 Q3 R176 R177 R178 R179 R180 R181 R182 R183 R184 R185 R186 R187 R188 R189 R190 R191 R192 R193 R194 R195 R196 R197 R198 R199 R200 R201 R202 R203 R204 R205 R206 R207 R208 R209 R210 R211 R212 R213 R214 R215 R216 U15 Y1
component class ZynqEMIO: D6 D7 R90 R91 R92 R93 R94 R95 R96 R97 R98 R99 R100 R101 R102 R103 R104 R105 R106 R107 R108 R109 R110 R111 R112 R113 R114 R115 R116 R117 R118 R119 R120 R121 R122 R123 R124 R125 R126 R127 R128 R129 R130 R131 U1
component class ZynqEMIO_2: R132 R133 R134 R135 R136 R137 R138 R139 R140 R141 R142 R143 R144 R145 R146 R147 R148 R149 R150 R151 R152 R153 R154 R155 R156 R157 R158 R159 R160 R161 R162 R163 R164 R165 R166 R167 R168 R169 R170 R171 R172 R173 R174 R175
component class ZynqDDR: C1 C2 C3 C4 C5 C6 C7 C8 C9 C10 C11 C12 C13 C14 C15 C16 C17 C18 C19 C20 C21 C22 C23 C24 C25 C26 C27 C28 C29 R5 R6 R7 R8 R9 R10 R11 R12 R13 R14 R15 R16 R17 R18 R19 R20 R21 R22 R23 R24 R25 R26 R27 R28 R29 R30 R31 R32 R33 R34 R? U2 U3
component class PowerSequence: C132 C134 C135 C136 C137 C138 C139 C140 C142 C143 C144 D4 D5 L8 L9 Q1 Q2 R77 R78 R79 R80 R81 R82 R83 R84 R85 R86 R87 R88 R89 U12 U13 U14
component class Ethernet: C107 C108 C109 C110 C111 C112 C113 C114 C115 C116 C117 C118 C119 C120 C121 C122 C123 C124 C125 C126 C127 C128 C129 C130 D1 D2 D3 L5 L6 L7 R48 R49 R50 R51 R52 R53 R54 R55 R56 R57 R58 R59 R60 R61 R62 R63 R64 R65 R66 R67 R68 R69 R70 R71 R72 R73 R74 R75 R76 U9 U10 U11 X1
component class BoardConnector: J1 R1 R2 R3 R4
component class AnalogSense: C95 C96 C97 C98 C99 C100 C101 C102 C103 C104 C105 C106 L4 R42 R43 R44 R45 R46 R47 U7 U8
differential pair DDR3_CK: +DDR3_CK_P -DDR3_CK_N
differential pair GB_A: +GB_A_P -GB_A_N
differential pair GB_B: +GB_B_P -GB_B_N
differential pair GB_C: +GB_C_P -GB_C_N
differential pair GB_D: +GB_D_P -GB_D_N
differential pair TRX0: +TRX0_P -TRX0_N
differential pair TRX1: +TRX1_P -TRX1_N
differential pair TRX2: +TRX2_P -TRX2_N
differential pair TRX3: +TRX3_P -TRX3_N
differential pair DDR3_DQS0: +DDR3_DQS0_P -DDR3_DQS0_N
differential pair DDR3_DQS1: +DDR3_DQS1_P -DDR3_DQS1_N

## Components (designator, comment, footprint, x,y, rotation, side; value= is the part's Value field where it differs from the comment)
C1 "?" C0402_IPC_H 1173.23,594.49 r90 bottom value=0.1uF
C2 "?" C0402_IPC_H 1173.23,846.46 r270 bottom value=0.1uF
C3 "?" C0201_IPC_H 514.76,830.71 r180 bottom value=0.1uF
C4 "?" C0201_IPC_H 704.72,704.72 r180 bottom value=0.1uF
C5 "?" C0201_IPC_H 468.5,1066.93 r270 bottom value=0.1uF
C6 "?" C0201_IPC_H 515.75,1019.68 r0 bottom value=0.1uF
C7 "?" C0201_IPC_H 468.5,1003.94 r270 bottom value=0.1uF
C8 "?" C0201_IPC_H 468.5,940.94 r90 bottom value=0.1uF
C9 "?" C0201_IPC_H 484.25,862.2 r180 bottom value=0.1uF
C10 "?" C0201_IPC_H 531.5,783.46 r90 bottom value=0.1uF
C11 "?" C0201_IPC_H 468.5,688.98 r90 bottom value=0.1uF
C12 "?" C0201_IPC_H 468.5,625.98 r90 bottom value=0.1uF
C13 "?" C0402_IPC_H 255.91,767.72 r90 top value=10uF
C14 "?" C0402_IPC_H 346.46,846.46 r0 bottom value=10uF
C15 "?" C0402_IPC_H 614.17,893.7 r270 bottom value=10uF
C16 "?" C0402_IPC_H 803.15,523.62 r180 bottom value=10uF
C17 "?" C0201_IPC_H 736.22,1082.68 r0 bottom value=0.1uF
C18 "?" C0201_IPC_H 751.97,1035.43 r90 bottom value=0.1uF
C19 "?" C0201_IPC_H 736.22,988.19 r180 bottom value=0.1uF
C20 "?" C0201_IPC_H 736.22,956.69 r180 bottom value=0.1uF
C21 "?" C0201_IPC_H 704.72,862.2 r0 bottom value=0.1uF
C22 "?" C0201_IPC_H 720.47,814.96 r90 bottom value=0.1uF
C23 "?" C0201_IPC_H 751.97,657.48 r270 bottom value=0.1uF
C24 "?" C0201_IPC_H 751.97,594.49 r270 bottom value=0.1uF
C25 "?" C0201_IPC_H 259.84,602.36 r0 bottom value=0.1uF
C26 "?" C0201_IPC_H 287.4,767.72 r90 top value=0.1uF
C27 "?" C0201_IPC_H 153.54,763.78 r90 top value=0.1uF
C28 "?" C0402_IPC_H 169.29,669.29 r270 top value=10uF
C29 "?" C0402_IPC_H 220.47,767.72 r90 top value=10uF
C30 "?" C0402_IPC_H 1901.57,1047.83 r90 top value=10uF
C31 "?" C0402 1866.14,1049.21 r90 top value=0.1uF
C32 "?" C0402 2195.47,1079.53 r270 bottom value=0.1uF
C33 "?" C0402_IPC_H 2230.91,1080.12 r270 bottom value=10uF
C34 "?" C0402 2082.68,984.25 r90 top value=0.1uF
C35 "?" C0402_IPC_H 2129.92,984.25 r90 bottom value=10uF
C36 "Murata GRM32ER60J107ME20L" C1210_IPC_H 1728.35,1011.81 r270 top value=100uF
C37 "?" C0402_IPC_H 1472.44,925.2 r0 bottom value=4.7uF
C38 "Murata GRM155R60J474KE19D" C0402_IPC_H 1440.94,988.19 r180 bottom value=0.47uF
C39 "Murata GRM32ER60J107ME20L" C1210_IPC_H 1728.35,814.96 r90 top value=100uF
C40 "?" C0402_IPC_H 1220.47,956.69 r0 bottom value=4.7uF
C41 "Murata GRM155R60J474KE19D" C0402_IPC_H 1188.98,1019.68 r0 bottom value=0.47uF
C42 "Murata GRM155R60J474KE19D" C0402_IPC_H 1188.98,547.24 r0 bottom value=4.7uF
C43 "?" C0402_IPC_H 1188.98,673.23 r0 bottom value=4.7uF
C44 "?" C0402_IPC_H 1267.72,468.5 r90 bottom value=0.47uF
C45 "?" C0402_IPC_H 1219.88,578.74 r180 bottom value=0.47uF
C46 "?" C0402_IPC_H 1220.47,484.25 r0 bottom value=0.47uF
C47 "?" C0402_IPC_H 1330.71,500 r270 bottom value=0.47uF
C48 "Murata GRM155R60J474KE19D" C0805_M 1488.19,1122.05 r0 bottom value=47uF
C49 "Murata GRM155R60J474KE19D" C0402_IPC_H 1251.97,673.23 r0 bottom value=4.7uF
C50 "Murata GRM155R60J474KE19D" C0402_IPC_H 1251.97,830.71 r0 bottom value=0.47uF
C51 "?" C1210_IPC_H 1728.35,814.96 r90 bottom value=100uF
C52 "Murata GRM155R60J474KE19D" C0402_IPC_H 1425.2,625.98 r90 bottom value=4.7uF
C53 "?" C0402_IPC_H 1582.68,468.5 r90 bottom value=4.7uF
C54 "?" C0402_IPC_H 1551.18,688.98 r90 bottom value=0.47uF
C55 "?" C0402_IPC_H 1566.93,578.74 r0 bottom value=0.47uF
C56 "?" C0402_IPC_H 1393.7,531.5 r90 bottom value=0.47uF
C57 "?" C0402_IPC_H 1488.19,500 r90 bottom value=0.47uF
C58 "Murata GRM32ER60J107ME20L" C1210_IPC_H 1728.35,1011.81 r270 bottom value=100uF
C59 "Murata GRM155R60J474KE19D" C0402_IPC_H 1346.46,704.72 r0 bottom value=4.7uF
C60 "Murata GRM155R60J474KE19D" C0402_IPC_H 1299.21,657.48 r90 bottom value=0.47uF
C61 "?" C0402_IPC_H 1566.93,736.22 r180 bottom value=4.7uF
C62 "?" C0402_IPC_H 1409.45,830.71 r180 bottom value=4.7uF
C63 "?" C0402_IPC_H 1456.69,720.47 r90 bottom value=0.47uF
C64 "?" C0402_IPC_H 1535.43,799.21 r0 bottom value=0.47uF
C65 "Murata GRM155R60J474KE19D" C0402_IPC_H 1503.94,862.2 r180 bottom value=0.47uF
C66 "Murata GRM155R60J474KE19D" C0402_IPC_H 1582.68,940.94 r270 bottom value=0.47uF
C67 "Murata GRM32ER60J107ME20L" C1210_IPC_H 728.35,377.95 r0 top value=100uF
C68 "Murata GRM155R60J474KE19D" C0402_IPC_H 1031.5,862.2 r0 bottom value=4.7uF
C69 "Murata GRM155R60J474KE19D" C0402_IPC_H 1062.99,641.73 r0 bottom value=0.47uF
C70 "Murata GRM155R60J474KE19D" C0402_IPC_H 1047.24,751.97 r90 bottom value=0.47uF
C71 "Murata GRM155R60J474KE19D" C0402_IPC_H 1062.99,956.69 r0 bottom value=0.47uF
C72 "Murata GRM155R60J474KE19D" C0402_IPC_H 1031.5,1019.68 r180 bottom value=0.47uF
C73 "Murata GRM155R60J474KE19D" C0402_IPC_H 1220.47,862.2 r180 bottom value=0.47uF
C74 "?" C0402_IPC_H 1188.98,1125.98 r90 bottom value=10uF
C75 "?" C0805_M 1102.36,1129.92 r180 top value=47uF
C76 "?" C0402_IPC_H 1267.72,751.97 r270 bottom value=0.1uF
C77 "Murata GRM155R60J474KE19D" C0402_IPC_H 1283.46,1125.98 r90 top value=0.47uF
C78 "Murata GRM32ER60J107ME20L" C1210_IPC_H 1748.03,633.86 r0 top value=100uF
C79 "Murata GRM32ER60J107ME20L" C1210_IPC_H 1728.35,484.25 r270 bottom value=100uF
C80 "Murata GRM32ER60J107ME20L" C1210_IPC_H 1748.03,633.86 r0 bottom value=100uF
C81 "" C0402_IPC_H 1377.95,736.22 r180 bottom value=4.7uF
C82 "Murata GRM155R60J474KE19D" C0402_IPC_H 1377.95,641.73 r0 bottom value=4.7uF
C83 "Murata GRM155R60J474KE19D" C0402_IPC_H 1377.95,610.24 r180 bottom value=0.47uF
C84 "Murata GRM155R60J474KE19D" C0402_IPC_H 1362.2,846.46 r90 bottom value=0.47uF
C85 "Murata GRM155R60J474KE19D" C0402_IPC_H 1377.95,673.23 r180 bottom value=0.47uF
C86 "Murata GRM155R60J474KE19D" C0402_IPC_H 1377.95,767.72 r0 bottom value=0.47uF
C87 "Murata GRM32ER60J107ME20L" C1210_IPC_H 1850.39,484.25 r270 bottom value=100uF
C88 "Murata GRM155R60J474KE19D" C0402_IPC_H 1330.71,877.95 r90 bottom value=4.7uF
C89 "Murata GRM155R60J474KE19D" C0402_IPC_H 1299.21,846.46 r90 bottom value=0.47uF
C90 "Murata GRM32ER60J107ME20L" C1210_IPC_H 1728.35,484.25 r270 top value=100uF
C91 "Murata GRM155R60J474KE19D" C0402_IPC_H 1188.98,799.21 r0 bottom value=4.7uF
C92 "Murata GRM155R60J474KE19D" C0402_IPC_H 1220.47,736.22 r0 bottom value=0.47uF
C93 "Murata GRM155R60J474KE19D" C0402_IPC_H 1188.98,767.72 r180 bottom value=0.47uF
C94 "Murata GRM155R60J474KE19D" C0402_IPC_H 1220.47,610.24 r0 bottom value=0.47uF
C95 "?" C0402 170,380 r0 top value=47nF
C96 "?" C0402_IPC_H 326.77,185.04 r180 top value=10uF
C97 "?" C0201 350,220 r180 top value=0.1uF
C98 "?" C0402_IPC_H 342.52,200.79 r90 bottom value=10uF
C99 "?" C0201 314.96,200.79 r90 bottom value=0.1uF
C100 "?" C0201 275,220 r0 top value=0.1uF
C101 "?" C0402_IPC_H 263.78,185.04 r0 top value=10uF
C102 "?" C0201 212.6,464.57 r0 top value=0.1uF
C103 "?" C0201 374.02,204.72 r90 bottom value=0.1uF
C104 "?" C0402_IPC_H 263.78,185.04 r0 bottom value=10uF
C105 "?" C0201 456.69,464.57 r180 bottom value=0.1uF
C106 "?" C0201 535.43,236.22 r270 top value=0.1uF
C107 "?" C0402 2976.38,496.06 r270 bottom value=1000pF
C108 "?" C0201_IPC_H 2946.85,1015.75 r0 top value=0.1uF
C109 "?" C0201_IPC_H 2832.68,1015.75 r0 top value=0.1uF
C110 "?" C0201_IPC_H 2710.63,1015.75 r0 top value=0.1uF
C111 "?" C0201_IPC_H 2592.52,1015.75 r0 top value=0.1uF
C112 "?" C0201 2608.27,929.13 r270 bottom value=27pF
C113 "?" C0201 2734.25,937.01 r90 bottom value=27pF
C114 "?" C0201_IPC_H 2429.53,921.26 r0 top value=0.1uF
C115 "?" C0201_IPC_H 2487.8,921.26 r180 top value=0.1uF
C116 "?" C0201 2921.26,1141.73 r180 top value=470pF
C117 "?" C0201 2803.15,1141.73 r180 top value=470pF
C118 "?" C0201 3039.37,1141.73 r180 top value=470pF
C119 "?" C0402 2466.54,728.35 r0 top value=0.1uF
C120 "?" C0402_IPC_H 2458.66,751.97 r0 bottom value=10uF
C121 "?" C0402 2466.54,795.28 r0 bottom value=0.1uF
C122 "?" C0402 2557.09,937.01 r0 bottom value=0.1uF
C123 "?" C0402_IPC_H 2580.71,980.32 r180 bottom value=10uF
C124 "?" C0402 2797.24,755.91 r180 bottom value=0.1uF
C125 "?" C0402 2797.24,826.77 r180 bottom value=4.7uF
C126 "?" C0402 2797.24,897.64 r180 bottom value=0.1uF
C127 "?" C0402 2797.24,720.47 r180 bottom value=0.1uF
C128 "?" C0402 2797.24,862.2 r180 bottom value=0.1uF
C129 "?" C0402 2746.06,610.24 r270 bottom value=4.7uF
C130 "?" C0402 2868.11,881.89 r0 bottom value=4.7uF
C132 "?" C0402_IPC_H 2212.6,685.04 r270 bottom value=10uF
C134 "?" C0805_M 1968.5,399.61 r90 bottom value=47uF
C135 "?" C0805_M 2025.59,492.13 r180 top value=47uF
C136 "?" C0402_IPC_H 2303.15,649.61 r0 bottom value=10uF
C137 "?" C0402_IPC_H 2047.24,673.23 r90 top value=10uF
C138 "?" C0402_IPC_H 2047.24,673.23 r90 bottom value=10uF
C139 "?" C0402_IPC_H 1881.89,641.73 r270 bottom value=10uF
C140 "?" C0402 2244.09,523.62 r180 top value=33nF
C142 "?" C0402_IPC_H 181.1,960.63 r0 bottom value=10uF
C143 "?" C0805_M 303.15,972.44 r0 top value=47uF
C144 "?" C1210_IPC_H 2236.22,405.51 r0 top value=100uF
C145 "?" C0402 1860.24,842.52 r0 bottom value=0.1uF
C146 "?" C0402 976.1,1118.62 r270 bottom value=0.1uF
C147 "?" C0402_IPC_H 1283.46,925.2 r0 bottom value=0.1uF
D1 "?" LED0603_M 3070.87,1102.36 r180 top value=RED
D2 "?" LED0603_M 2834.65,1102.36 r180 top value=YELLOW
D3 "?" LED0603_M 2952.76,1102.36 r180 top value=GREEN
D4 "?" LED0603_M 2452.76,1125.98 r0 top value=GREEN
D5 "?" LED0603_M 1956.69,842.52 r90 top value=GREEN
D6 "?" LED0603_M 913.39,421.26 r90 top value=YELLOW
D7 "?" LED0603_M 862.2,421.26 r90 top value=RED
D8 "?" LED0603_M 1909.45,1125.98 r180 top value=RED
D9 "?" LED0603_M 2059.06,1125.98 r0 top value=YELLOW
J1 "MINIDIMM244" MINIDIMM244 125.98,55.12 r0 top locked
L1 "BK1005HM241-T" L0402_H 1224.41,1125.98 r90 top value=240
L2 "BK1005HM241-T" L0402_H 1224.41,1125.98 r90 bottom value=240
L3 "BK1005HM241-T" L0402_H 1283.46,1125.98 r90 bottom value=240
L4 "BK1005HM241-T" L0402_H 513.78,185.04 r180 top value=240
L5 "BK1005HM241-T" L0402_H 2797.24,791.34 r0 bottom value=240
L6 "Wurth 74438323047" L2520_H 2454.72,877.95 r90 bottom value=4.7uH
L7 "BK1005HM241-T" L0402_H 2466.54,708.66 r180 bottom value=240
L8 "DFE252012F-R47M=P2" L2520_H 1897.64,438.98 r90 top value=0.47uH
L9 "DFE252012F-R47M=P2" L2520_H 220.47,1070.87 r0 top value=0.47uH
Q1 "NTR2101P" SOT23-H 1964.57,673.23 r180 bottom
Q2 "NDS331N" SSOT-3_H 1964.57,673.23 r180 top
Q3 "NDS331N" SSOT-3_H 2499.41,346.46 r270 top
R1 "?" R0402_IPC_H 2615,195 r270 top value=OPEN
R2 "?" R0402_IPC_H 2650,195 r270 bottom value=OPEN
R3 "?" R0402_IPC_H 1165.35,181.1 r180 bottom value=OPEN
R4 "?" R0402_IPC_H 1244.09,181.1 r180 bottom value=OPEN
R5 "?" R0201_IPC_H 703.74,767.72 r180 bottom value=40.2
R6 "?" R0201_IPC_H 405.51,783.46 r180 top value=40.2
R7 "?" R0201_IPC_H 405.51,751.97 r180 top value=40.2
R8 "?" R0201_IPC_H 577.76,799.21 r0 bottom value=40.2
R9 "?" R0201_IPC_H 577.76,767.72 r0 bottom value=40.2
R10 "?" R0201_IPC_H 577.76,736.22 r0 bottom value=40.2
R11 "?" R0201_IPC_H 405.51,720.47 r180 top value=40.2
R12 "?" R0201_IPC_H 703.74,673.23 r180 bottom value=40.2
R13 "?" R0201_IPC_H 577.76,704.72 r0 bottom value=40.2
R14 "?" R0201_IPC_H 577.76,578.74 r0 bottom value=40.2
R15 "?" R0201_IPC_H 641.73,704.72 r180 bottom value=40.2
R16 "?" R0201_IPC_H 640.75,610.24 r180 bottom value=40.2
R17 "?" R0201_IPC_H 641.73,767.72 r180 bottom value=40.2
R18 "?" R0201_IPC_H 577.76,610.24 r0 bottom value=40.2
R19 "?" R0201_IPC_H 703.74,578.74 r180 bottom value=40.2
R20 "?" R0201_IPC_H 405.51,625.98 r180 bottom value=40.2
R21 "?" R0201_IPC_H 703.74,610.24 r180 bottom value=40.2
R22 "?" R0201_IPC_H 405.51,657.48 r180 bottom value=40.2
R23 "?" R0201_IPC_H 703.74,641.73 r180 bottom value=40.2
R24 "?" R0201_IPC_H 405.51,688.98 r180 bottom value=40.2
R25 "?" R0201_IPC_H 577.76,641.73 r0 bottom value=40.2
R26 "?" R0201_IPC_H 641.73,673.23 r180 bottom value=40.2
R27 "?" R0201_IPC_H 577.76,673.23 r0 bottom value=40.2
R28 "?" R0402_IPC_H 656.5,814.96 r90 bottom value=80.6
R29 "?" R0402_IPC_H 1110.24,783.46 r90 bottom value=80.6
R30 "?" R0402_IPC_H 1141.73,877.95 r270 bottom value=80.6
R31 "?" R0402_IPC_H 736.22,736.22 r180 bottom value=240
R32 "?" R0402_IPC_H 484.25,578.74 r0 bottom value=4.7K
R33 "?" R0402_IPC_H 200.79,803.15 r0 bottom value=2.37K
R34 "?" R0402_IPC_H 185.04,767.72 r90 top value=2.37K
R35 "Yageo AC0201JR-0710KL" R0201_IPC_H 1905.51,983.27 r90 top value=10K
R36 "Yageo AC0201JR-0710KL" R0201_IPC_H 2187.6,827.56 r0 top value=10K
R37 "Yageo AC0201JR-0710KL" R0201_IPC_H 1874.02,983.27 r270 top value=10K
R38 "?" R0402_IPC_H 1173.23,720.47 r90 bottom value=4.7K
R39 "?" R0402_IPC_H 1299.21,562.99 r270 bottom value=4.7K
R40 "?" R0402_IPC_H 1330.71,562.99 r270 bottom value=4.7K
R41 "?" R0201_IPC_H 1188.98,893.7 r180 bottom value=49.9
R42 "?" R0603 149.61,208.66 r90 top value=4.64K
R43 "?" R0603 150,310 r270 top value=1K
R44 "?" R0402_IPC_H 275.59,464.57 r180 top value=4.7K
R45 "?" R0402_IPC_H 393.7,464.57 r0 top value=4.7K
R46 "?" R0402_IPC_H 393.7,464.57 r0 bottom value=4.7K
R47 "?" R0402_IPC_H 275.59,464.57 r180 bottom value=4.7K
R48 "?" R0402_IPC_H 2578.74,500 r270 bottom value=75
R49 "?" R0402_IPC_H 2700.79,496.06 r270 bottom value=75
R50 "?" R0402_IPC_H 2818.9,496.06 r270 bottom value=75
R51 "?" R0402_IPC_H 2937.01,496.06 r270 bottom value=75
R52 "?" R0201_IPC_H 2490.16,622.05 r0 bottom value=22
R53 "?" R0201_IPC_H 2490.16,677.17 r0 bottom value=22
R54 "?" R0201_IPC_H 2568.9,637.8 r0 bottom value=22
R55 "?" R0201_IPC_H 2604.33,586.61 r90 bottom value=22
R56 "?" R0201_IPC_H 2659.45,586.61 r90 bottom value=22
R57 "?" R0201_IPC_H 2687.01,610.24 r90 bottom value=22
R58 "?" R0402_IPC_H 2438.98,763.78 r0 top value=OPEN
R59 "?" R0402_IPC_H 2438.98,889.76 r0 top value=OPEN
R60 "?" R0402_IPC_H 2494.09,799.21 r270 top value=1.5K
R61 "?" R0402_IPC_H 2494.09,870.08 r90 top value=OPEN
R62 "Yageo AC0201JR-0710KL" R0201_IPC_H 2789.37,688.98 r0 bottom value=10K
R63 "?" R0402_IPC_H 2797.24,940.94 r0 bottom value=2.37K
R64 "Yageo AC0201JR-0710KL" R0201_IPC_H 2409.45,724.41 r90 bottom value=10K
R65 "Yageo AC0201JR-0710KL" R0201_IPC_H 2848.43,929.13 r270 bottom value=10K
R66 "Yageo AC0201JR-0710KL" R0201_IPC_H 2875.98,929.13 r270 bottom value=10K
R67 "?" R0402_IPC_H 3098.43,1145.67 r0 top value=510
R68 "Yageo AC0201JR-0710KL" R0201_IPC_H 2537.4,893.7 r180 bottom value=10K
R69 "?" R0402_IPC_H 2862.2,1145.67 r0 top value=510
R70 "?" R0402_IPC_H 2980.31,1145.67 r0 top value=510
R71 "Yageo AC0201JR-0710KL" R0201_IPC_H 2490.16,594.49 r0 bottom value=10K
R72 "Yageo AC0201JR-0710KL" R0201_IPC_H 2490.16,649.61 r0 bottom value=10K
R73 "Yageo AC0201JR-0710KL" R0201_IPC_H 2549.21,586.61 r90 bottom value=10K
R74 "Yageo AC0201JR-0710KL" R0201_IPC_H 2576.77,586.61 r90 bottom value=10K
R75 "Yageo AC0201JR-0710KL" R0201_IPC_H 2631.89,586.61 r90 bottom value=10K
R76 "Yageo AC0201JR-0710KL" R0201_IPC_H 2714.57,610.24 r90 bottom value=10K
R77 "?" R0603 1962.6,529.53 r180 bottom value=41.2K
R78 "?" R0402_IPC_H 2078.74,673.23 r90 bottom value=25K
R79 "?" R0603 2354.33,594.49 r90 top value=57.6K
R80 "?" R0603 2055.12,474.41 r0 bottom value=162K
R81 "Yageo AC0201JR-0710KL" R0201_IPC_H 2181.1,527.56 r180 top value=10K
R82 "?" R0603 2330.71,519.68 r0 top value=22.1K
R83 "Yageo AC0201JR-0710KL" R0201_IPC_H 2062.99,383.86 r270 bottom value=10K
R84 "?" R0402_IPC_H 1964.57,759.84 r0 top value=1K
R85 "?" R0603 314.96,992.13 r90 bottom value=143K
R86 "?" R0603 287.4,917.32 r0 bottom value=162K
R87 "?" R0402_IPC_H 2527.56,1125.98 r270 top value=510
R88 "?" R0402_IPC_H 2000,858.27 r270 top value=510
R89 "Yageo AC0201JR-0710KL" R0201_IPC_H 165.35,917.32 r180 bottom value=10K
R90 "?" R0402_IPC_H 913.39,440.94 r270 bottom value=510
R91 "?" R0402_IPC_H 862.2,440.94 r270 bottom value=510
R92 "?" R0402_IPC_H 645.67,181.1 r180 top value=10K
R93 "?" R0402_IPC_H 649.61,212.6 r0 top value=4.7K
R94 "?" R0402_IPC_H 724.41,192.91 r180 top value=4.7K
R95 "?" R0402_IPC_H 728.35,224.41 r0 top value=10K
R96 "?" R0402_IPC_H 787.4,220.47 r270 top value=10K
R97 "?" R0402_IPC_H 645.67,181.1 r180 bottom value=10K
R98 "?" R0402_IPC_H 649.61,212.6 r0 bottom value=4.7K
R99 "?" R0402_IPC_H 724.41,192.91 r180 bottom value=4.7K
R100 "?" R0402_IPC_H 728.35,224.41 r0 bottom value=10K
R101 "?" R0402_IPC_H 787.4,220.47 r270 bottom value=10K
R102 "?" R0402_IPC_H 1950,195 r90 bottom value=0
R103 "?" R0402_IPC_H 905.51,181.1 r180 top value=10K
R104 "?" R0402_IPC_H 909.45,212.6 r0 top value=4.7K
R105 "?" R0402_IPC_H 984.25,188.98 r180 top value=4.7K
R106 "?" R0402_IPC_H 988.19,220.47 r0 top value=10K
R107 "?" R0402_IPC_H 1047.24,212.6 r270 top value=10K
R108 "?" R0402_IPC_H 1433.07,401.57 r180 bottom value=4.7K
R109 "?" R0402_IPC_H 905.51,181.1 r180 bottom value=10K
R110 "?" R0402_IPC_H 909.45,212.6 r0 bottom value=4.7K
R111 "?" R0402_IPC_H 984.25,188.98 r180 bottom value=4.7K
R112 "?" R0402_IPC_H 988.19,220.47 r0 bottom value=10K
R113 "?" R0402_IPC_H 1047.24,212.6 r270 bottom value=10K
R114 "?" R0402_IPC_H 1185.04,228.35 r90 bottom value=0
R115 "?" R0402_IPC_H 1263.78,228.35 r90 bottom value=0
R116 "?" R0402_IPC_H 1600,195 r90 bottom value=0
R117 "?" R0402_IPC_H 1165.35,181.1 r180 top value=10K
R118 "?" R0402_IPC_H 1169.29,212.6 r0 top value=4.7K
R119 "?" R0402_IPC_H 1244.09,188.98 r180 top value=4.7K
R120 "?" R0402_IPC_H 1248.03,220.47 r0 top value=10K
R121 "?" R0402_IPC_H 1307.09,212.6 r270 top value=10K
R122 "?" R0402_IPC_H 1635,195 r90 bottom value=0
R123 "?" R0402_IPC_H 1600,195 r90 top value=0
R124 "?" R0402_IPC_H 1635,195 r90 top value=0
R125 "?" R0402_IPC_H 1670,195 r90 bottom value=0
R126 "?" R0402_IPC_H 1705,195 r90 bottom value=0
R127 "?" R0402_IPC_H 1775,195 r90 bottom value=0
R128 "?" R0402_IPC_H 1810,195 r90 bottom value=0
R129 "?" R0402_IPC_H 1845,195 r90 bottom value=0
R130 "?" R0402_IPC_H 1880,195 r90 bottom value=0
R131 "?" R0402_IPC_H 1915,195 r90 bottom value=0
R132 "?" R0402_IPC_H 2615,195 r90 bottom value=0
R133 "?" R0402_IPC_H 2657.48,342.52 r180 top value=49.9
R134 "?" R0402_IPC_H 2728.35,342.52 r180 top value=49.9
R135 "?" R0402_IPC_H 2870.08,342.52 r180 bottom value=49.9
R136 "?" R0402_IPC_H 2799.21,342.52 r180 top value=49.9
R137 "?" R0402_IPC_H 2650,195 r90 top value=510
R138 "?" R0402_IPC_H 2685,195 r90 top value=510
R139 "Yageo AC0201JR-0710KL" R0201_IPC_H 2685,195 r270 bottom value=10K
R140 "?" R0402_IPC_H 2720,195 r90 top value=510
R141 "?" R0402_IPC_H 2755,195 r90 top value=510
R142 "?" R0402_IPC_H 1985,195 r90 bottom value=0
R143 "?" R0402_IPC_H 2020,195 r90 bottom value=0
R144 "?" R0402_IPC_H 2055,195 r90 top value=0
R145 "?" R0402_IPC_H 2055,195 r90 bottom value=0
R146 "?" R0402_IPC_H 2090,195 r90 top value=0
R147 "?" R0402_IPC_H 2090,195 r90 bottom value=0
R148 "?" R0402_IPC_H 2125,195 r90 top value=0
R149 "?" R0402_IPC_H 2125,195 r90 bottom value=0
R150 "?" R0402_IPC_H 2160,195 r90 top value=0
R151 "?" R0402_IPC_H 2160,195 r90 bottom value=0
R152 "?" R0402_IPC_H 2195,195 r90 top value=0
R153 "?" R0402_IPC_H 2195,195 r90 bottom value=0
R154 "?" R0402_IPC_H 2230,195 r90 top value=0
R155 "?" R0402_IPC_H 2230,195 r90 bottom value=0
R156 "?" R0402_IPC_H 2265,195 r90 top value=0
R157 "?" R0402_IPC_H 2265,195 r90 bottom value=0
R158 "?" R0402_IPC_H 2300,195 r90 top value=0
R159 "?" R0402_IPC_H 2300,195 r90 bottom value=0
R160 "?" R0402_IPC_H 2335,195 r90 top value=0
R161 "?" R0402_IPC_H 2335,195 r90 bottom value=0
R162 "?" R0402_IPC_H 2370,195 r90 top value=0
R163 "?" R0402_IPC_H 2370,195 r90 bottom value=0
R164 "?" R0402_IPC_H 2405,195 r90 top value=0
R165 "?" R0402_IPC_H 2405,195 r90 bottom value=0
R166 "?" R0402_IPC_H 2440,195 r90 top value=0
R167 "?" R0402_IPC_H 2440,195 r90 bottom value=0
R168 "?" R0402_IPC_H 2475,195 r90 top value=0
R169 "?" R0402_IPC_H 2475,195 r90 bottom value=0
R170 "?" R0402_IPC_H 2510,195 r90 top value=0
R171 "?" R0402_IPC_H 2510,195 r90 bottom value=0
R172 "?" R0402_IPC_H 2545,195 r90 top value=0
R173 "?" R0402_IPC_H 2545,195 r90 bottom value=0
R174 "?" R0402_IPC_H 2580,195 r90 top value=0
R175 "?" R0402_IPC_H 2580,195 r90 bottom value=0
R176 "?" R0402_IPC_H 1860.24,807.09 r180 bottom value=4.7K
R177 "?" R0402_IPC_H 1129.65,1114.68 r270 bottom value=49.9
R178 "?" R0603 1370.08,1114.17 r180 bottom value=1K
R179 "?" R0603 1370.08,1114.17 r0 top value=1K
R180 "?" R0402_IPC_H 2345.08,1082.48 r90 bottom value=20K
R181 "?" R0402_IPC_H 2242.72,827.56 r180 top value=20K
R182 "?" R0402_IPC_H 2320.75,828.03 r180 top value=20K
R183 "?" R0402_IPC_H 2219.09,1134.65 r0 top value=20K
R184 "?" R0402_IPC_H 2293.9,1082.48 r90 bottom value=20K
R185 "?" R0402_IPC_H 1220.47,925.2 r180 bottom value=20K
R186 "?" R0402_IPC_H 1141.73,972.44 r270 bottom value=20K
R187 "?" R0201_IPC_H 1598.43,1051.18 r0 bottom value=22
R188 "?" R0201_IPC_H 1393.7,940.94 r90 bottom value=22
R189 "?" R0402_IPC_H 3085,300 r270 top value=4.7K
R190 "?" R0402_IPC_H 3085,370 r90 top value=4.7K
R191 "?" R0402_IPC_H 3085,300 r270 bottom value=4.7K
R192 "?" R0402_IPC_H 3085,370 r90 bottom value=4.7K
R193 "?" R0201_IPC_H 1567.91,988.19 r0 bottom value=22
R194 "?" R0201_IPC_H 1299.21,972.44 r90 bottom value=22
R195 "?" R0201_IPC_H 1535.43,1051.18 r0 bottom value=22
R196 "?" R0402_IPC_H 2499.41,374.02 r0 bottom value=4.7K
R197 "?" R0402_IPC_H 2499.41,338.58 r0 bottom value=4.7K
R198 "?" R0201_IPC_H 1425.2,909.45 r90 bottom value=22
R199 "Yageo AC0201JR-0710KL" R0201_IPC_H 2855,210 r180 top value=10K
R200 "Yageo AC0201JR-0710KL" R0201_IPC_H 2855,210 r180 bottom value=10K
R201 "Yageo AC0201JR-0710KL" R0201_IPC_H 2925,210 r0 top value=10K
R202 "Yageo AC0201JR-0710KL" R0201_IPC_H 2925,210 r0 bottom value=10K
R203 "Yageo AC0201JR-0710KL" R0201_IPC_H 2995,175 r180 top value=10K
R204 "Yageo AC0201JR-0710KL" R0201_IPC_H 2995,175 r180 bottom value=10K
R205 "Yageo AC0201JR-0710KL" R0201_IPC_H 3065,175 r0 top value=10K
R206 "Yageo AC0201JR-0710KL" R0201_IPC_H 3065,175 r0 bottom value=10K
R207 "?" R0402_IPC_H 1834.65,1125.98 r270 top value=200
R208 "?" R0402_IPC_H 1984.25,1125.98 r270 top value=200
R209 "Yageo AC0201JR-0710KL" R0201_IPC_H 2855,175 r180 top value=10K
R210 "Yageo AC0201JR-0710KL" R0201_IPC_H 2855,175 r180 bottom value=10K
R211 "Yageo AC0201JR-0710KL" R0201_IPC_H 2925,175 r0 top value=10K
R212 "Yageo AC0201JR-0710KL" R0201_IPC_H 2925,175 r0 bottom value=10K
R213 "Yageo AC0201JR-0710KL" R0201_IPC_H 2995,210 r180 top value=10K
R214 "Yageo AC0201JR-0710KL" R0201_IPC_H 2995,210 r180 bottom value=10K
R215 "Yageo AC0201JR-0710KL" R0201_IPC_H 3065,210 r0 top value=10K
R216 "Yageo AC0201JR-0710KL" R0201_IPC_H 3065,210 r0 bottom value=10K
R? "?" R0402_IPC_H 271.65,814.96 r180 top value=0
U1 "XNLX-XC7Z020-CLG400" CLG400 1299.21,736.22 r0 top locked
U2 "MT41J128M16JT-96" MICT-JT-96 610.24,830.71 r0 top locked
U3 "TPS51200DRCR" DRC0010J_V 240.16,704.72 r270 bottom
U4 "25AA02E48T-I/OT" SOT-23-OT6_L 1992.13,1011.81 r180 top
U5 "N25Q128A13EF7" V-PDFN-8_H 2267.72,980.32 r90 top
U6 "25AA256-I/ST" TSSOP-ST8_L 1968.5,1011.81 r0 bottom
U7 "AD7689BCPZ" CP-20-4_N 335,340 r90 top
U8 "AD7689BCPZ" CP-20-4_N 335,340 r90 bottom
U9 "H5077NL" H5077NL 2797.24,732.28 r90 top
U10 "AR8035" QFN40_H 2635.83,763.78 r270 bottom
U11 "TXS0102" X2SON-8_H 2442.91,826.77 r0 top
U12 "TPS62085" VSON-8_L 2084.65,409.45 r180 top
U13 "ADP1755ACPZ-R7" CP-16-4_L 2236.22,637.8 r0 top
U14 "TPS62085" VSON-8_L 188.98,893.7 r90 top
U15 "DS1818" SOT23-H 1860.24,850.39 r90 top
X1 "XRCGB25M000F3M00R0" XRCGB_F 51151.57,-47980.32 r0 bottom value=25MHz
Y1 "ASDMB-33.333MHZ-LY-T" ABRA-ASDMB-4_V 1055.12,1118.11 r0 bottom

## Footprints (in the part's own frame and the unit in brackets; to place one, negate y for a bottom-side part, rotate by r counter-clockwise, add the part's x,y. Pads: shape width x height; smd on the part's side, far side on the other; paste and mask are expansions set on the pad)
ABRA-ASDMB-4_V [mm] "SMD, 4-Leads, Body 2.5x2mm, Height 0.9mm"
  rect 0.65x0.85 smd: 1(-0.825,-0.775) 2(0.825,-0.775) 3(0.825,0.775) 4(-0.825,0.775)
  silkscreen extent -1.82,-0.9 -1.57,-0.65, body extent -1.25,-1 1.25,1, height 0.9
C0201 [mm] "Chip Capacitor, 2-Leads, Body 0.60x0.30mm, IPC Medium Density"
  rect 0.46x0.42 smd: 1(-0.325,0) 2(0.325,0)
  body extent -0.33,-0.17 0.33,0.18, height 0.23
C0201_IPC_H [mm] "Chip Capacitor, 2-Leads, Body 0.60x0.30mm, IPC High Density"
  rect 0.35x0.35 smd: 1(-0.325,0) 2(0.325,0)
  body extent -0.31,-0.16 0.32,0.17, height 0.33
C0402 [mm] "Chip Capacitor, Body 1.0x0.5mm, IPC High Density"
  rect 0.55x0.55 smd: 1(-0.45,0) 2(0.45,0)
  body extent -0.53,-0.27 0.53,0.28, height 0.35
C0402_IPC_H [mm] "Chip Capacitor, 2-Leads, Body 1.00x0.50mm, IPC High Density"
  rect 0.5x0.52 smd: 1(-0.415,0) 2(0.415,0)
  body extent -0.53,-0.28 0.53,0.28, height 0.55
C0805_M [mm] "Chip Capacitor, 2-Leads, Body 2.00x1.25mm, IPC Medium Density"
  rect 1x1.45 smd: 1(-0.95,0) 2(0.95,0)
  body extent -1.1,-0.63 0.9,0.63, height 1
C1210_IPC_H [mm] "Chip Capacitor, 2-Leads, Body 3.20x2.50mm, IPC High Density"
  rect 1.35x2.6 smd: 1(-1.225,0) 2(1.225,0)
  silkscreen extent -0.15,-1.2 0.15,1.2, body extent -1.75,-1.35 1.75,1.35, height 2.7
CLG400 [mm] "BGA, 400-Balls, Body 17x17mm, Pitch 0.8mm"
  round 0.45 smd: A1(-7.6,7.6) A2(-6.8,7.6) A3(-6,7.6) A4(-5.2,7.6) A5(-4.4,7.6) A6(-3.6,7.6) A7(-2.8,7.6) A8(-2,7.6) A9(-1.2,7.6) A10(-0.4,7.6) A11(0.4,7.6) A12(1.2,7.6) A13(2,7.6) A14(2.8,7.6) A15(3.6,7.6) A16(4.4,7.6) A17(5.2,7.6) A18(6,7.6) A19(6.8,7.6) A20(7.6,7.6) B1(-7.6,6.8) B2(-6.8,6.8) B3(-6,6.8) B4(-5.2,6.8) B5(-4.4,6.8) B6(-3.6,6.8) B7(-2.8,6.8) B8(-2,6.8) B9(-1.2,6.8) B10(-0.4,6.8) B11(0.4,6.8) B12(1.2,6.8) B13(2,6.8) B14(2.8,6.8) B15(3.6,6.8) B16(4.4,6.8) B17(5.2,6.8) B18(6,6.8) B19(6.8,6.8) B20(7.6,6.8) C1(-7.6,6) C2(-6.8,6) C3(-6,6) C4(-5.2,6) C5(-4.4,6) C6(-3.6,6) C7(-2.8,6) C8(-2,6) C9(-1.2,6) C10(-0.4,6) C11(0.4,6) C12(1.2,6) C13(2,6) C14(2.8,6) C15(3.6,6) C16(4.4,6) C17(5.2,6) C18(6,6) C19(6.8,6) C20(7.6,6) D1(-7.6,5.2) D2(-6.8,5.2) D3(-6,5.2) D4(-5.2,5.2) D5(-4.4,5.2) D6(-3.6,5.2) D7(-2.8,5.2) D8(-2,5.2) D9(-1.2,5.2) D10(-0.4,5.2) D11(0.4,5.2) D12(1.2,5.2) D13(2,5.2) D14(2.8,5.2) D15(3.6,5.2) D16(4.4,5.2) D17(5.2,5.2) D18(6,5.2) D19(6.8,5.2) D20(7.6,5.2) E1(-7.6,4.4) E2(-6.8,4.4) E3(-6,4.4) E4(-5.2,4.4) E5(-4.4,4.4) E6(-3.6,4.4) E7(-2.8,4.4) E8(-2,4.4) E9(-1.2,4.4) E10(-0.4,4.4) E11(0.4,4.4) E12(1.2,4.4) E13(2,4.4) E14(2.8,4.4) E15(3.6,4.4) E16(4.4,4.4) E17(5.2,4.4) E18(6,4.4) E19(6.8,4.4) E20(7.6,4.4) F1(-7.6,3.6) F2(-6.8,3.6) F3(-6,3.6) F4(-5.2,3.6) F5(-4.4,3.6) F6(-3.6,3.6) F7(-2.8,3.6) F8(-2,3.6) F9(-1.2,3.6) F10(-0.4,3.6) F11(0.4,3.6) F12(1.2,3.6) F13(2,3.6) F14(2.8,3.6) F15(3.6,3.6) F16(4.4,3.6) F17(5.2,3.6) F18(6,3.6) F19(6.8,3.6) F20(7.6,3.6) G1(-7.6,2.8) G2(-6.8,2.8) G3(-6,2.8) G4(-5.2,2.8) G5(-4.4,2.8) G6(-3.6,2.8) G7(-2.8,2.8) G8(-2,2.8) G9(-1.2,2.8) G10(-0.4,2.8) G11(0.4,2.8) G12(1.2,2.8) G13(2,2.8) G14(2.8,2.8) G15(3.6,2.8) G16(4.4,2.8) G17(5.2,2.8) G18(6,2.8) G19(6.8,2.8) G20(7.6,2.8) H1(-7.6,2) H2(-6.8,2) H3(-6,2) H4(-5.2,2) H5(-4.4,2) H6(-3.6,2) H7(-2.8,2) H8(-2,2) H9(-1.2,2) H10(-0.4,2) H11(0.4,2) H12(1.2,2) H13(2,2) H14(2.8,2) H15(3.6,2) H16(4.4,2) H17(5.2,2) H18(6,2) H19(6.8,2) H20(7.6,2) J1(-7.6,1.2) J2(-6.8,1.2) J3(-6,1.2) J4(-5.2,1.2) J5(-4.4,1.2) J6(-3.6,1.2) J7(-2.8,1.2) J8(-2,1.2) J9(-1.2,1.2) J10(-0.4,1.2) J11(0.4,1.2) J12(1.2,1.2) J13(2,1.2) J14(2.8,1.2) J15(3.6,1.2) J16(4.4,1.2) J17(5.2,1.2) J18(6,1.2) J19(6.8,1.2) J20(7.6,1.2) K1(-7.6,0.4) K2(-6.8,0.4) K3(-6,0.4) K4(-5.2,0.4) K5(-4.4,0.4) K6(-3.6,0.4) K7(-2.8,0.4) K8(-2,0.4) K9(-1.2,0.4) K10(-0.4,0.4) K11(0.4,0.4) K12(1.2,0.4) K13(2,0.4) K14(2.8,0.4) K15(3.6,0.4) K16(4.4,0.4) K17(5.2,0.4) K18(6,0.4) K19(6.8,0.4) K20(7.6,0.4) L1(-7.6,-0.4) L2(-6.8,-0.4) L3(-6,-0.4) L4(-5.2,-0.4) L5(-4.4,-0.4) L6(-3.6,-0.4) L7(-2.8,-0.4) L8(-2,-0.4) L9(-1.2,-0.4) L10(-0.4,-0.4) L11(0.4,-0.4) L12(1.2,-0.4) L13(2,-0.4) L14(2.8,-0.4) L15(3.6,-0.4) L16(4.4,-0.4) L17(5.2,-0.4) L18(6,-0.4) L19(6.8,-0.4) L20(7.6,-0.4) M1(-7.6,-1.2) M2(-6.8,-1.2) M3(-6,-1.2) M4(-5.2,-1.2) M5(-4.4,-1.2) M6(-3.6,-1.2) M7(-2.8,-1.2) M8(-2,-1.2) M9(-1.2,-1.2) M10(-0.4,-1.2) M11(0.4,-1.2) M12(1.2,-1.2) M13(2,-1.2) M14(2.8,-1.2) M15(3.6,-1.2) M16(4.4,-1.2) M17(5.2,-1.2) M18(6,-1.2) M19(6.8,-1.2) M20(7.6,-1.2) N1(-7.6,-2) N2(-6.8,-2) N3(-6,-2) N4(-5.2,-2) N5(-4.4,-2) N6(-3.6,-2) N7(-2.8,-2) N8(-2,-2) N9(-1.2,-2) N10(-0.4,-2) N11(0.4,-2) N12(1.2,-2) N13(2,-2) N14(2.8,-2) N15(3.6,-2) N16(4.4,-2) N17(5.2,-2) N18(6,-2) N19(6.8,-2) N20(7.6,-2) P1(-7.6,-2.8) P2(-6.8,-2.8) P3(-6,-2.8) P4(-5.2,-2.8) P5(-4.4,-2.8) P6(-3.6,-2.8) P7(-2.8,-2.8) P8(-2,-2.8) P9(-1.2,-2.8) P10(-0.4,-2.8) P11(0.4,-2.8) P12(1.2,-2.8) P13(2,-2.8) P14(2.8,-2.8) P15(3.6,-2.8) P16(4.4,-2.8) P17(5.2,-2.8) P18(6,-2.8) P19(6.8,-2.8) P20(7.6,-2.8) R1(-7.6,-3.6) R2(-6.8,-3.6) R3(-6,-3.6) R4(-5.2,-3.6) R5(-4.4,-3.6) R6(-3.6,-3.6) R7(-2.8,-3.6) R8(-2,-3.6) R9(-1.2,-3.6) R10(-0.4,-3.6) R11(0.4,-3.6) R12(1.2,-3.6) R13(2,-3.6) R14(2.8,-3.6) R15(3.6,-3.6) R16(4.4,-3.6) R17(5.2,-3.6) R18(6,-3.6) R19(6.8,-3.6) R20(7.6,-3.6) T1(-7.6,-4.4) T2(-6.8,-4.4) T3(-6,-4.4) T4(-5.2,-4.4) T5(-4.4,-4.4) T6(-3.6,-4.4) T7(-2.8,-4.4) T8(-2,-4.4) T9(-1.2,-4.4) T10(-0.4,-4.4) T11(0.4,-4.4) T12(1.2,-4.4) T13(2,-4.4) T14(2.8,-4.4) T15(3.6,-4.4) T16(4.4,-4.4) T17(5.2,-4.4) T18(6,-4.4) T19(6.8,-4.4) T20(7.6,-4.4) U1(-7.6,-5.2) U2(-6.8,-5.2) U3(-6,-5.2) U4(-5.2,-5.2) U5(-4.4,-5.2) U6(-3.6,-5.2) U7(-2.8,-5.2) U8(-2,-5.2) U9(-1.2,-5.2) U10(-0.4,-5.2) U11(0.4,-5.2) U12(1.2,-5.2) U13(2,-5.2) U14(2.8,-5.2) U15(3.6,-5.2) U16(4.4,-5.2) U17(5.2,-5.2) U18(6,-5.2) U19(6.8,-5.2) U20(7.6,-5.2) V1(-7.6,-6) V2(-6.8,-6) V3(-6,-6) V4(-5.2,-6) V5(-4.4,-6) V6(-3.6,-6) V7(-2.8,-6) V8(-2,-6) V9(-1.2,-6) V10(-0.4,-6) V11(0.4,-6) V12(1.2,-6) V13(2,-6) V14(2.8,-6) V15(3.6,-6) V16(4.4,-6) V17(5.2,-6) V18(6,-6) V19(6.8,-6) V20(7.6,-6) W1(-7.6,-6.8) W2(-6.8,-6.8) W3(-6,-6.8) W4(-5.2,-6.8) W5(-4.4,-6.8) W6(-3.6,-6.8) W7(-2.8,-6.8) W8(-2,-6.8) W9(-1.2,-6.8) W10(-0.4,-6.8) W11(0.4,-6.8) W12(1.2,-6.8) W13(2,-6.8) W14(2.8,-6.8) W15(3.6,-6.8) W16(4.4,-6.8) W17(5.2,-6.8) W18(6,-6.8) W19(6.8,-6.8) W20(7.6,-6.8) Y1(-7.6,-7.6) Y2(-6.8,-7.6) Y3(-6,-7.6) Y4(-5.2,-7.6) Y5(-4.4,-7.6) Y6(-3.6,-7.6) Y7(-2.8,-7.6) Y8(-2,-7.6) Y9(-1.2,-7.6) Y10(-0.4,-7.6) Y11(0.4,-7.6) Y12(1.2,-7.6) Y13(2,-7.6) Y14(2.8,-7.6) Y15(3.6,-7.6) Y16(4.4,-7.6) Y17(5.2,-7.6) Y18(6,-7.6) Y19(6.8,-7.6) Y20(7.6,-7.6)
  silkscreen extent -9.27,-8.5 8.5,8.5, body extent -8.5,-8.5 8.5,8.5, height 1.6
CP-16-4_L [mm] "QFN, 16-Leads, Body 4x4mm, Pitch 0.65mm, Thermal Pad 2.1x2.1mm, IPC High Density"
  oval 0.85x0.3 smd: 1(-1.825,0.975) 2(-1.825,0.325) 3(-1.825,-0.325) 4(-1.825,-0.975) 9(1.825,-0.975) 10(1.825,-0.325) 11(1.825,0.325) 12(1.825,0.975)
  oval 0.3x0.85 smd: 5(-0.975,-1.825) 6(-0.325,-1.825) 7(0.325,-1.825) 8(0.975,-1.825) 13(0.975,1.825) 14(0.325,1.825) 15(-0.325,1.825) 16(-0.975,1.825)
  rect 2.1x2.1 smd: 17(0,0)
  silkscreen extent -2.92,-2.15 2.15,2.15, body extent -2,-2 2,2, height 1
CP-20-4_N [mm] "QFN, 20-Leads, Body 4x4mm, Pitch 0.5mm, Thermal Pad 2.5x2.5mm, IPC Medium Density"
  oval 0.9x0.25 smd: 1(-1.95,1) 2(-1.95,0.5) 3(-1.95,0) 4(-1.95,-0.5) 5(-1.95,-1) 11(1.95,-1) 12(1.95,-0.5) 13(1.95,0) 14(1.95,0.5) 15(1.95,1)
  oval 0.25x0.9 smd: 6(-1,-1.95) 7(-0.5,-1.95) 8(0,-1.95) 9(0.5,-1.95) 10(1,-1.95) 16(1,1.95) 17(0.5,1.95) 18(0,1.95) 19(-0.5,1.95) 20(-1,1.95)
  rect 2.5x2.5 smd: 21(0,0)
  silkscreen extent -2.97,-2.2 2.2,2.2, body extent -2.05,-2.05 2.05,2.05, height 1
DRC0010J_V [mm] "SON, 10-Leads, Body 3x3mm, Pitch 0.5mm, Thermal Pad 2.4x1.65mm, TI Recommended"
  rrect36% 0.85x0.28 smd paste-0.025 mask+0.07: 1(-1.475,1) 2(-1.475,0.5) 3(-1.475,0) 4(-1.475,-0.5) 5(-1.475,-1) 6(1.475,-1) 7(1.475,-0.5) 8(1.475,0) 9(1.475,0.5) 10(1.475,1)
  rrect6% 1.65x2.4 smd paste-0.825 mask+0.07: 11(0,0)
  Component Side region: -0.39,1.9 -0.11,1.9 -0.11,1.2 -0.39,1.2
  Component Side region: 0.39,1.2 0.11,1.2 0.11,1.9 0.39,1.9
  Component Side region: 0.39,-1.9 0.11,-1.9 0.11,-1.2 0.39,-1.2
  Component Side region: -0.39,-1.2 -0.11,-1.2 -0.11,-1.9 -0.39,-1.9
  silkscreen extent -2.15,-1.7 1.7,1.7, body extent -1.55,-1.55 1.55,1.55, height 1
H5077NL [mm] "SOJ, 24-Leads, Body 13.97x12.57mm, Pitch 1.00mm, IPC High Density"
  rect 2.03x0.63 smd: 1(-5.715,5.5) 2(-5.715,4.5) 3(-5.715,3.5) 4(-5.715,2.5) 5(-5.715,1.5) 6(-5.715,0.5) 7(-5.715,-0.5) 8(-5.715,-1.5) 9(-5.715,-2.5) 10(-5.715,-3.5) 11(-5.715,-4.5) 12(-5.715,-5.5) 13(5.715,-5.5) 14(5.715,-4.5) 15(5.715,-3.5) 16(5.715,-2.5) 17(5.715,-1.5) 18(5.715,-0.5) 19(5.715,0.5) 20(5.715,1.5) 21(5.715,2.5) 22(5.715,3.5) 23(5.715,4.5) 24(5.715,5.5)
  silkscreen extent -5.84,-7 4.03,7, body extent -6.28,-6.98 6.28,6.98, height 4.57
L0402_H [mm] "Chip Inductor, 2-Leads, Body 1.00x0.50mm, IPC High Density"
  rect 0.55x0.55 smd: 1(-0.45,0) 2(0.45,0)
  body extent -0.53,-0.28 0.53,0.28, height 0.55
L2520_H [mm] "Chip Inductor, 2-Leads, Body 2.50x2.00mm, IPC High Density"
  rect 0.85x2.3 smd: 1(-1,0) 2(1,0)
  silkscreen extent -0.1,-0.9 0.1,0.9, body extent -1.35,-1.1 1.35,1.1, height 1.2
LED0603_M [mm] "Chip LED, 2-Leads, Body 1.6x0.8mm, IPC Medium Density"
  rect 0.8x0.8 smd: 1(-0.8,0) 2(0.8,0)
  silkscreen extent -1.5,-0.3 -1.5,0.3, body extent -0.8,-0.4 0.8,0.4, height 0.7
MICT-JT-96 [mm] "BGA, 96-Balls, Body 14x8mm, Pitch 0.8mm"
  round 0.4 smd: A1(-3.2,6) A2(-2.4,6) A3(-1.6,6) A7(1.6,6) A8(2.4,6) A9(3.2,6) B1(-3.2,5.2) B2(-2.4,5.2) B3(-1.6,5.2) B7(1.6,5.2) B8(2.4,5.2) B9(3.2,5.2) C1(-3.2,4.4) C2(-2.4,4.4) C3(-1.6,4.4) C7(1.6,4.4) C8(2.4,4.4) C9(3.2,4.4) D1(-3.2,3.6) D2(-2.4,3.6) D3(-1.6,3.6) D7(1.6,3.6) D8(2.4,3.6) D9(3.2,3.6) E1(-3.2,2.8) E2(-2.4,2.8) E3(-1.6,2.8) E7(1.6,2.8) E8(2.4,2.8) E9(3.2,2.8) F1(-3.2,2) F2(-2.4,2) F3(-1.6,2) F7(1.6,2) F8(2.4,2) F9(3.2,2) G1(-3.2,1.2) G2(-2.4,1.2) G3(-1.6,1.2) G7(1.6,1.2) G8(2.4,1.2) G9(3.2,1.2) H1(-3.2,0.4) H2(-2.4,0.4) H3(-1.6,0.4) H7(1.6,0.4) H8(2.4,0.4) H9(3.2,0.4) J1(-3.2,-0.4) J2(-2.4,-0.4) J3(-1.6,-0.4) J7(1.6,-0.4) J8(2.4,-0.4) J9(3.2,-0.4) K1(-3.2,-1.2) K2(-2.4,-1.2) K3(-1.6,-1.2) K7(1.6,-1.2) K8(2.4,-1.2) K9(3.2,-1.2) L1(-3.2,-2) L2(-2.4,-2) L3(-1.6,-2) L7(1.6,-2) L8(2.4,-2) L9(3.2,-2) M1(-3.2,-2.8) M2(-2.4,-2.8) M3(-1.6,-2.8) M7(1.6,-2.8) M8(2.4,-2.8) M9(3.2,-2.8) N1(-3.2,-3.6) N2(-2.4,-3.6) N3(-1.6,-3.6) N7(1.6,-3.6) N8(2.4,-3.6) N9(3.2,-3.6) P1(-3.2,-4.4) P2(-2.4,-4.4) P3(-1.6,-4.4) P7(1.6,-4.4) P8(2.4,-4.4) P9(3.2,-4.4) R1(-3.2,-5.2) R2(-2.4,-5.2) R3(-1.6,-5.2) R7(1.6,-5.2) R8(2.4,-5.2) R9(3.2,-5.2) T1(-3.2,-6) T2(-2.4,-6) T3(-1.6,-6) T7(1.6,-6) T8(2.4,-6) T9(3.2,-6)
  silkscreen extent -4.77,-7 4,7, body extent -4,-7 4,7, height 0.25